# EAGLE board oresat-gps-card (EAGLE 9.6.1), part 1 of 3
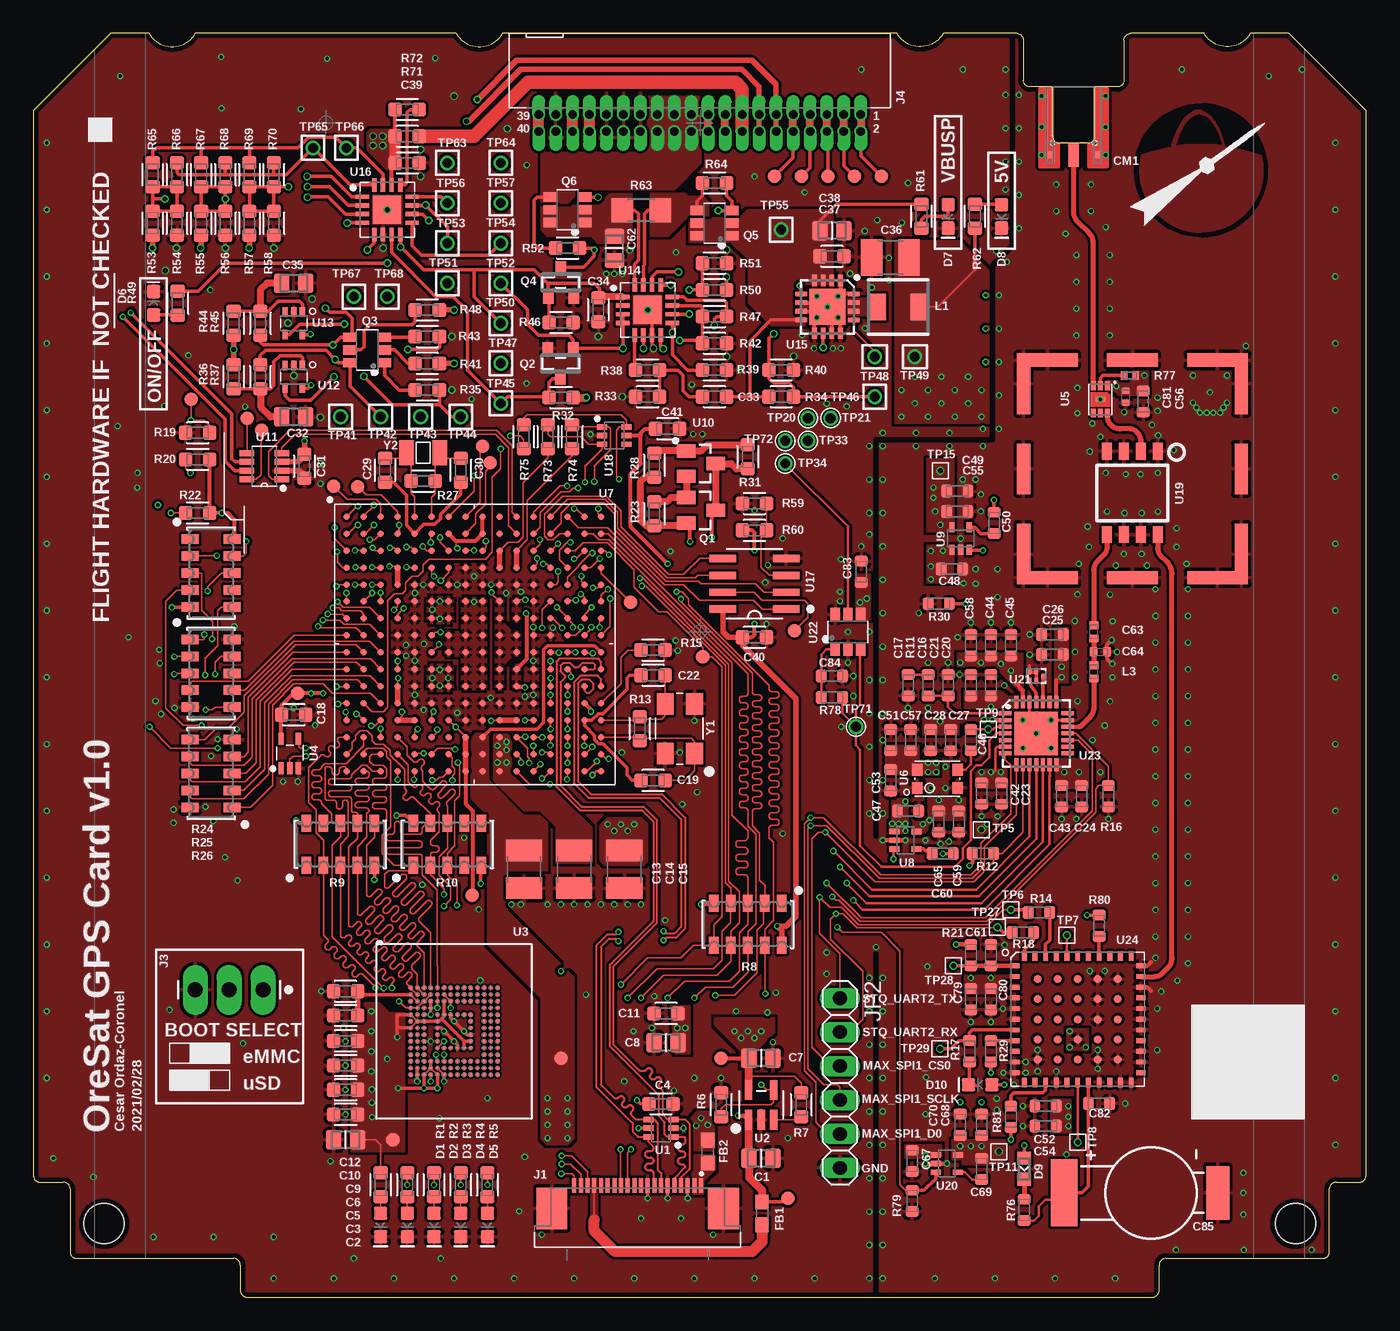
[diagram p0: board, top side]
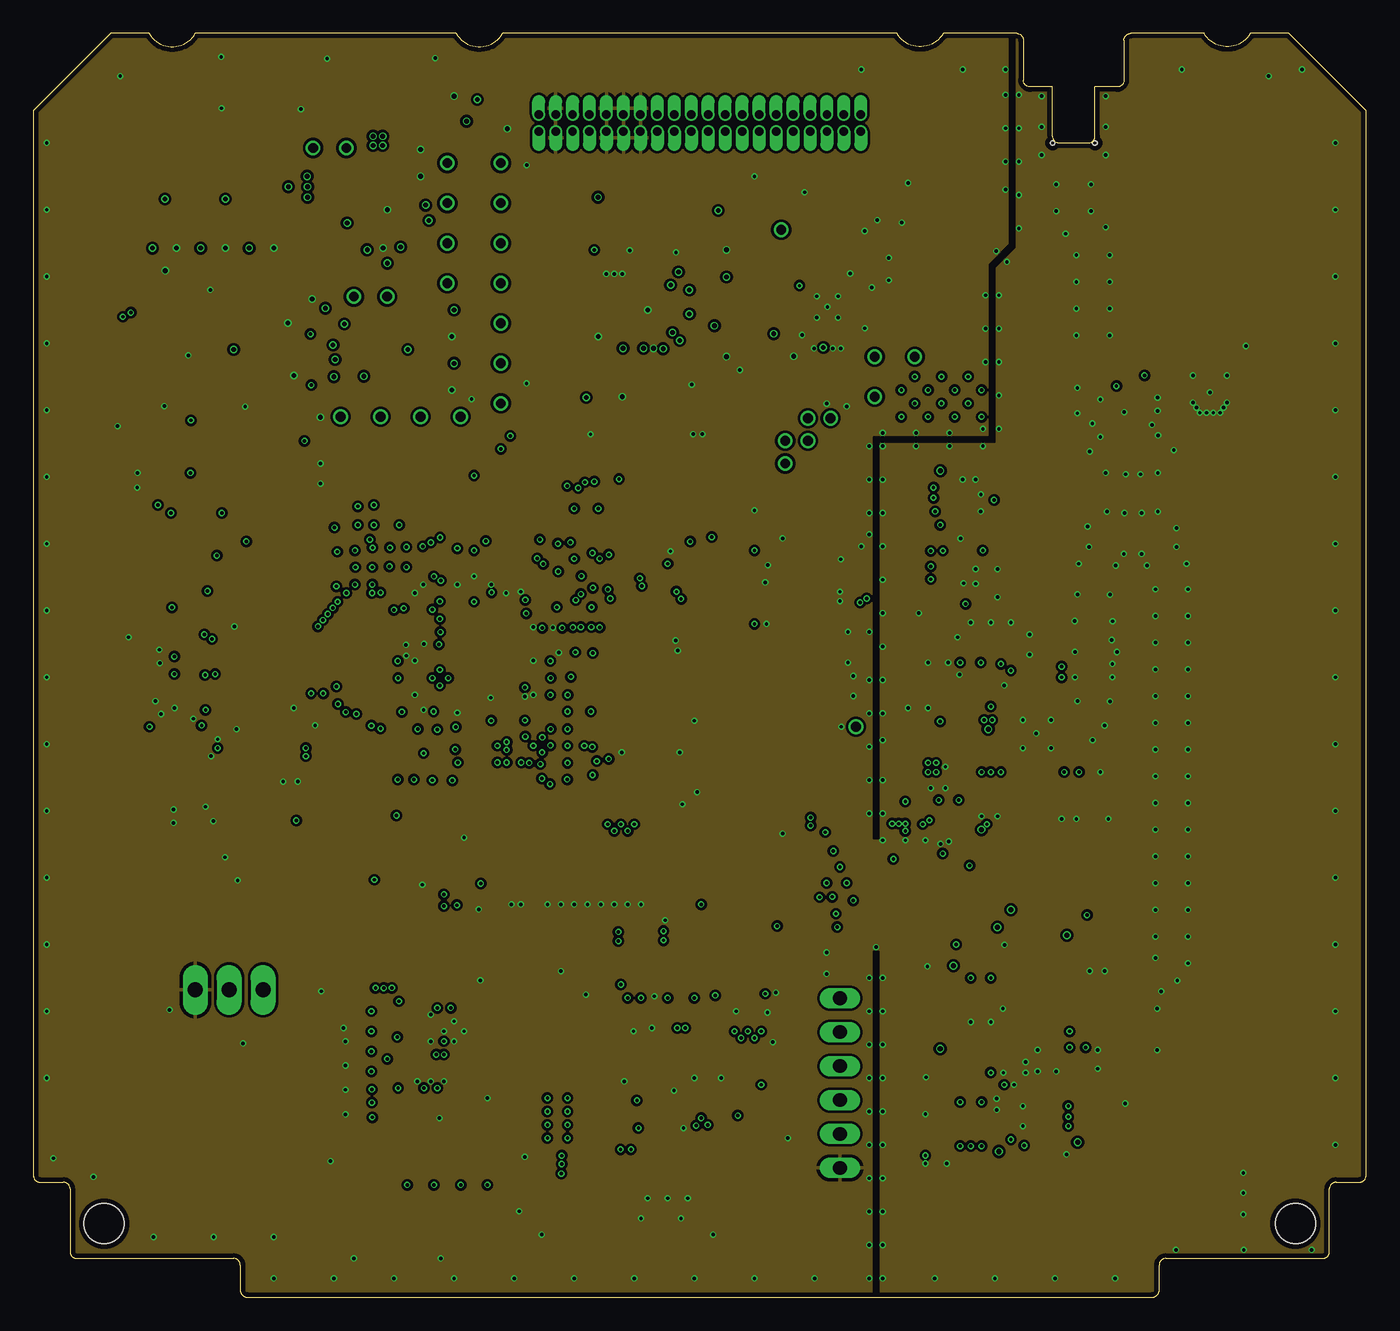
[diagram p1: board, inner layer Route2]
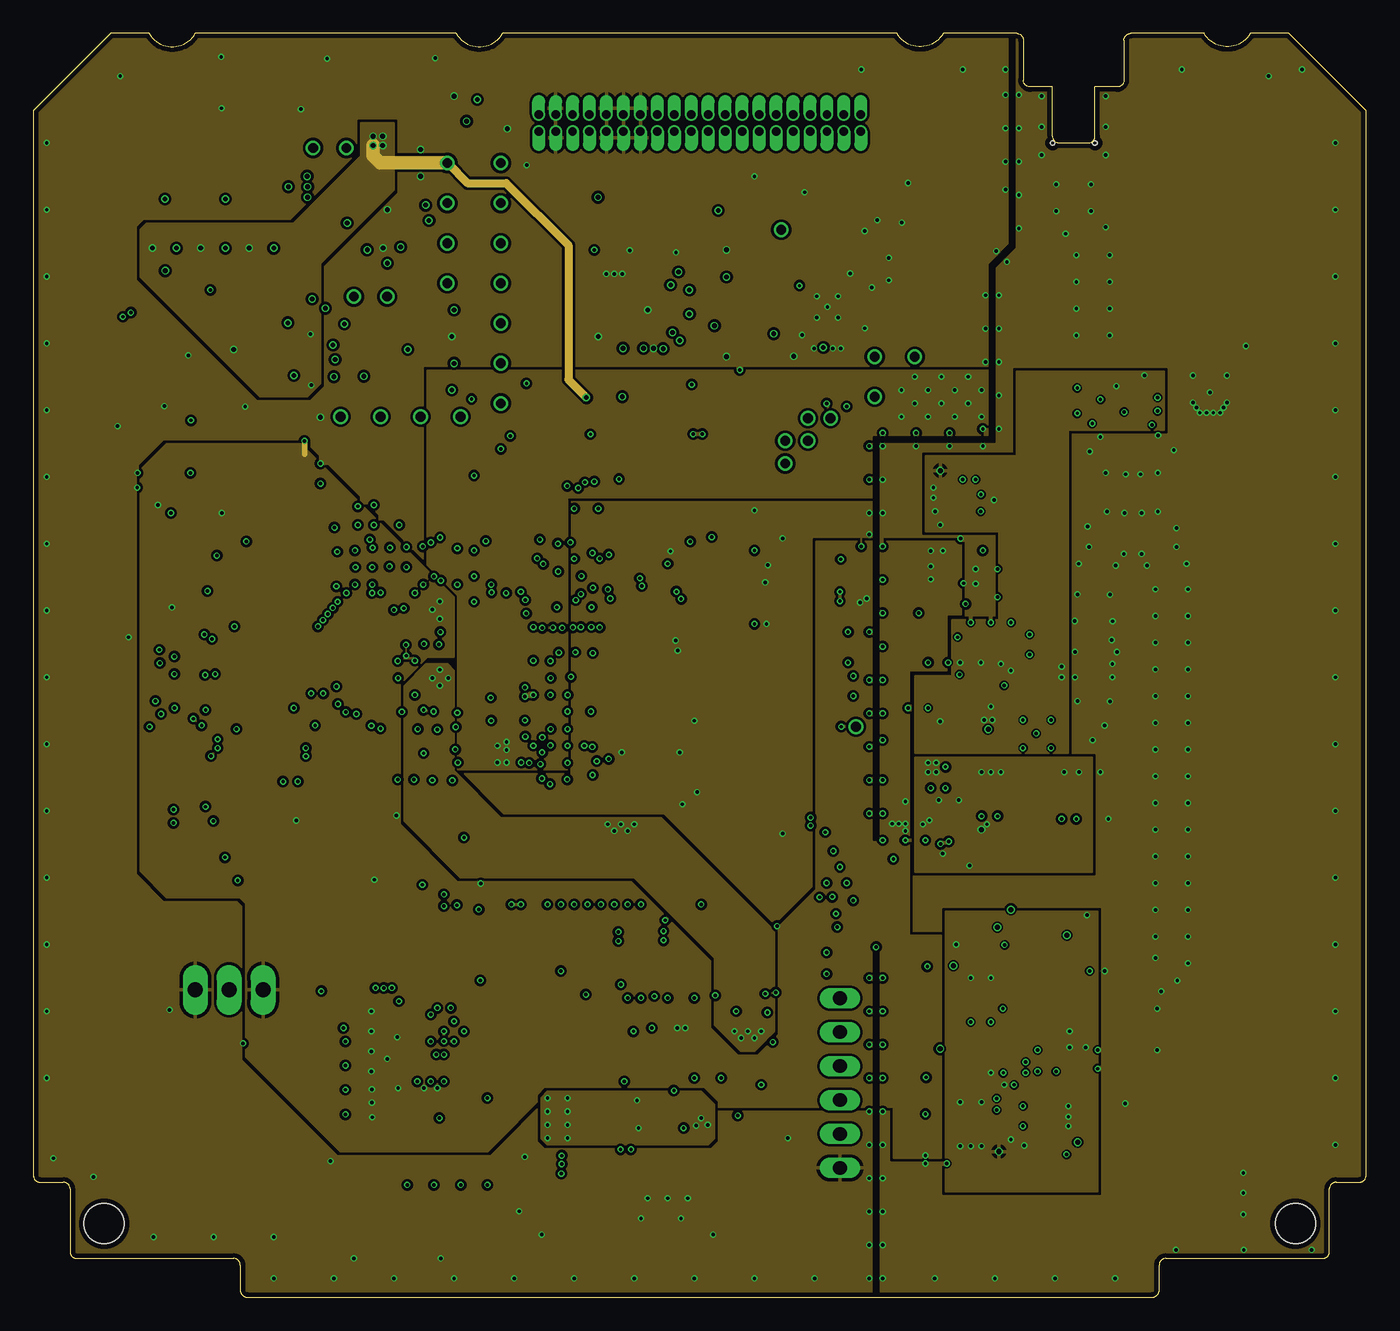
[diagram p2: board, inner layer Route15]
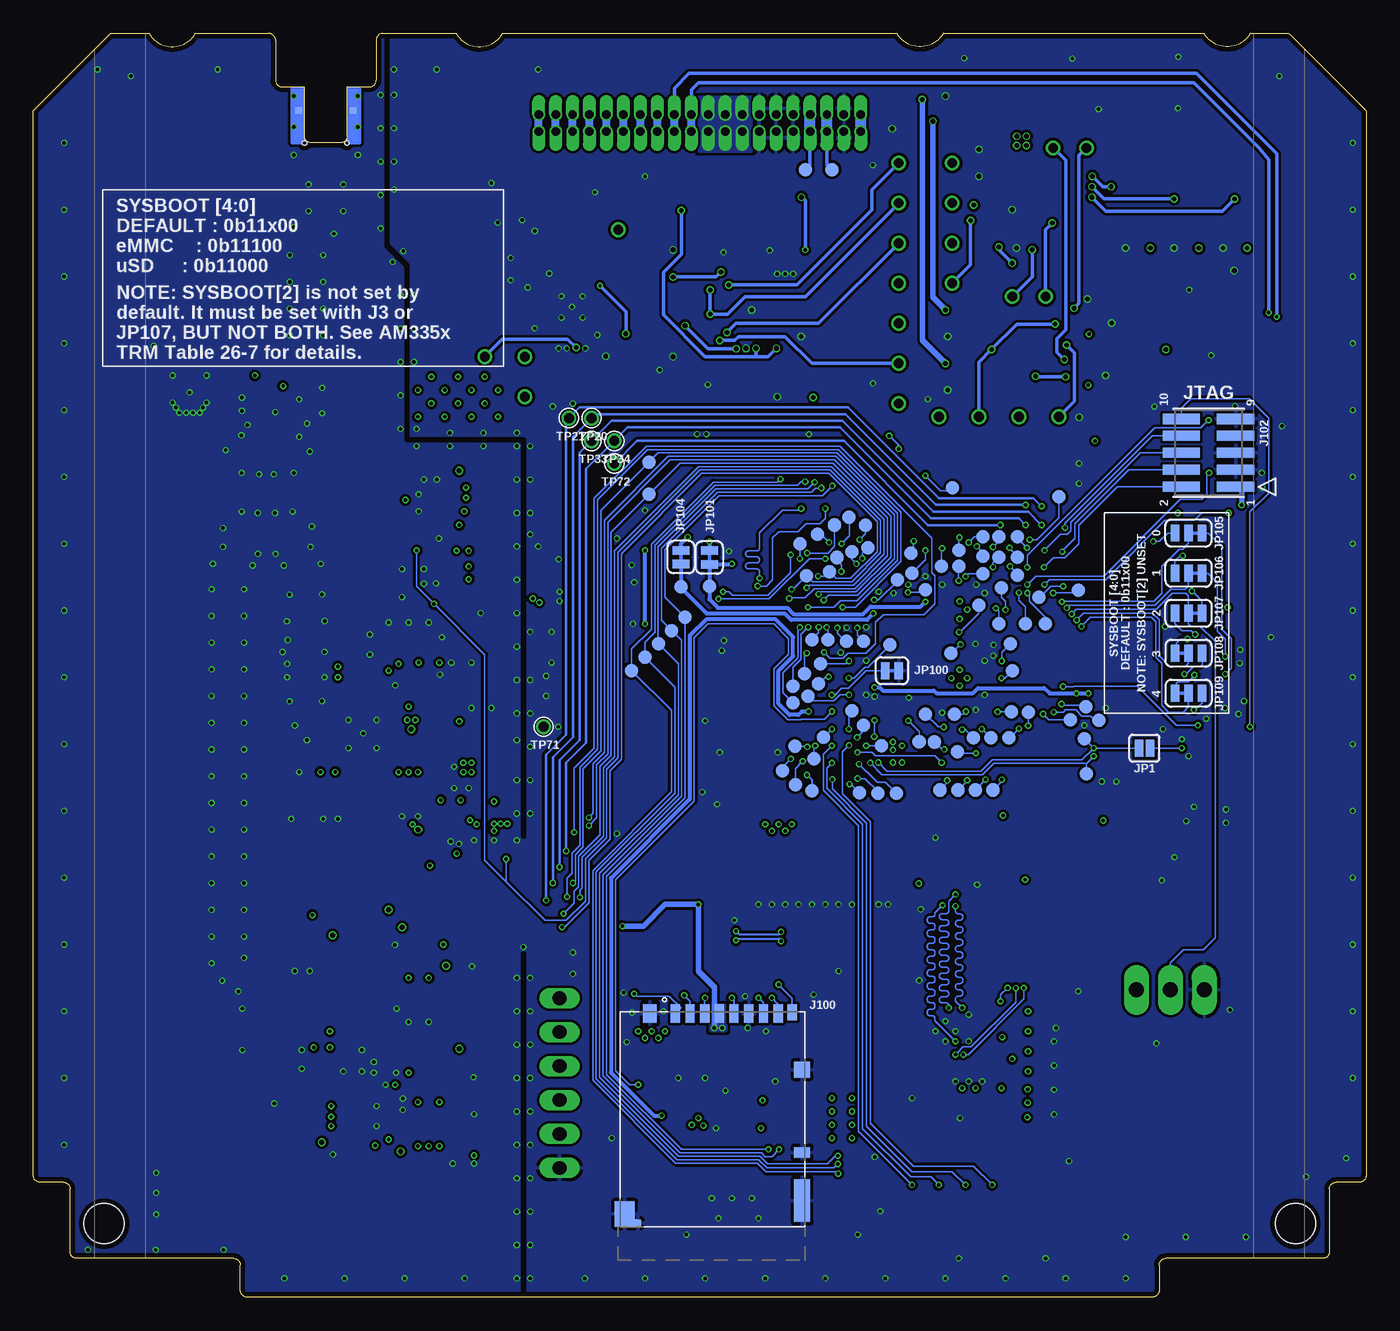
[diagram p3: board, bottom side, seen from below]

Size 99.8 x 94.6 mm. Coordinates in mm from the lower left corner, seen from the top.
Copper layers (1*2*15*16): Top 0.035559375mm / dielectric 0.17018125mm / Route2 0.01778125mm / dielectric 47mil / Route15 0.01778125mm / dielectric 0.17018125mm / Bottom 0.035559375mm
Design rules "4-layer_tented *": minimum track width 5mil, minimum drill 10mil, track to track 5mil, track to pad 5mil, pad to pad 5mil, via to via 5mil, smd to smd 5mil, copper to edge 15mil, drill to drill 6mil, minimum pad ring 4mil, minimum via ring 4mil, stop-mask expansion 2.5mil, vias tented up to drill 20mil, thermal gap 10mil
Net classes: 1 diff pair: width 0.191 mm, clearance 0.191 mm; 2 RF: clearance 0.75 mm
tRestrict: 6 lines
bRestrict: 6 lines

## Footprints (pad centres in the part's own frame; a part is rotated, then mirrored left to right if it is on the bottom)
.0805-B = smd 1.15 x 1.45: 1 -0.9,0; 2 0.9,0
.0603-A = smd 1 x 1.05: 1 -0.9,0; 2 0.9,0
C1210 = smd 1.6 x 2.7: 1 -1.4,0; 2 1.4,0
.0603-B-NOSILK = smd 0.8 x 0.95: 1 -0.8,0; 2 0.8,0
.0805-B-NOSILK = smd 1.15 x 1.45: 1 -0.9,0; 2 0.9,0
.0402-B-NOSILK = smd 0.6 x 0.7: 1 -0.5,0; 2 0.5,0
.0402-C-NOSILK = smd 0.5 x 0.6: 1 -0.45,0; 2 0.45,0
CAP-ELNA-DS-SERIES = smd 5 x 2: + 0,6.5 | smd 4 x 1.7: - 0,-5
J-MOLEX-SMPM-073300-003X = smd 0.508 x 0.508: P$1 -1.778,-5.08; P$2 1.778,-5.08 | smd 0.508 x 0.508 bottom: P$3 -2.032,-1.778; P$4 2.032,-1.778 | smd 0.762 x 1.778: RF 0,-5.08
LED-0603 = smd 1 x 1: A -0.877,0; C 0.877,0
0603-B-NOSILK-DIODE = smd 0.95 x 1: ANODE -0.8,0; CATHODE 0.8,0
0603 = smd 1.1 x 1: 1 -0.85,0; 2 0.85,0
TE_2-1734592-0 = smd 0.3 x 1.1: 1 -4.75,-1.7; 2 -4.25,-1.7; 3 -3.75,-1.7; 4 -3.25,-1.7; 5 -2.75,-1.7; 6 -2.25,-1.7; 7 -1.75,-1.7; 8 -1.25,-1.7; 9 -0.75,-1.7; 10 -0.25,-1.7; 11 0.25,-1.7; 12 0.75,-1.7; 13 1.25,-1.7; 14 1.75,-1.7; 15 2.25,-1.7; 16 2.75,-1.7; 17 3.25,-1.7; 18 3.75,-1.7; 19 4.25,-1.7; 20 4.75,-1.7 | smd 2.3 x 3.1: PAD1 6.42,0; PAD2 -6.42,0
1X03_LONGPADS = drill 1.118 pad 1.88 long: 1 0,0; 2 2.54,0; 3 5.08,0
J-SAMTEC-TFM-120-X1-XXX-D-RA = drill 0.635 pad 0.965 offset: 1 12.065,0.635; 2 12.065,-0.635; 3 10.795,0.635; 4 10.795,-0.635; 5 9.525,0.635; 6 9.525,-0.635; 7 8.255,0.635; 8 8.255,-0.635; 9 6.985,0.635; 10 6.985,-0.635; 11 5.715,0.635; 12 5.715,-0.635; 13 4.445,0.635; 14 4.445,-0.635; 15 3.175,0.635; 16 3.175,-0.635; 17 1.905,0.635; 18 1.905,-0.635; 19 0.635,0.635; 20 0.635,-0.635; 21 -0.635,0.635; 22 -0.635,-0.635; 23 -1.905,0.635; 24 -1.905,-0.635; 25 -3.175,0.635; 26 -3.175,-0.635; 27 -4.445,0.635; 28 -4.445,-0.635; 29 -5.715,0.635; 30 -5.715,-0.635; 31 -6.985,0.635; 32 -6.985,-0.635; 33 -8.255,0.635; 34 -8.255,-0.635; 35 -9.525,0.635; 36 -9.525,-0.635; 37 -10.795,0.635; 38 -10.795,-0.635; 39 -12.065,0.635; 40 -12.065,-0.635
DM3BT-DSF-PEJS = smd 0.7 x 1.4: 1 -3.2,15.95; 2 -2.1,15.95; 3 -1,15.95; 4 0.1,15.95; 5 1.2,15.95; 6 2.3,15.95; 7 3.4,15.95; 8 4.5,15.95 | smd 0.7 x 1.2: CD 5.55,16.05 | smd 0.5 x 0.5: CGND1 -6,0.25 | smd 1.5 x 1.9: CGND2 -7,0.95 | smd 0.21 x 0.21 rotated 45: CGND3 -6.25,0.5 | smd 1 x 1.4: CGND4 -5.1,15.95 | smd 1.2 x 1.2: CGND5 6.3,11.75 | smd 1.2 x 3.2: CGND6 6.3,1.95 | smd 1.2 x 0.8: GND 6.3,5.55
CON10_2X5_DUK_FTSH = smd 0.762 x 2.794: 1 -2.54,-2.032; 2 -2.54,2.032; 3 -1.27,-2.032; 4 -1.27,2.032; 5 0,-2.032; 6 0,2.032; 7 1.27,-2.032; 8 1.27,2.032; 9 2.54,-2.032; 10 2.54,2.032
SMT-JUMPER_2_NO_SILK = smd 0.635 x 1.27: 1 -0.406,0; 2 0.406,0
1X06 = drill 1.016 long: 1 -6.35,0; 2 -3.81,0; 3 -1.27,0; 4 1.27,0; 5 3.81,0; 6 6.35,0
SMT-JUMPER_2_NC_TRACE_SILK = smd 0.635 x 1.27: 1 -0.508,0; 2 0.508,0
SMT-JUMPER_3_1-NC_TRACE_SILK = smd 0.635 x 1.27: 1 -1.016,0; 2 0,0; 3 1.016,0
ECS-MPI4040 = smd 2 x 1.3: 1 0,1.575; 2 0,-1.575
ORESAT-CARD-V1.3-GENERIC-1RF-POS2 = hole 0.32: 76.31,86.4; 79.49,86.4 | hole 3: 94.5,5.5; 5.3,5.5
SOT23-BEC = smd 1 x 1.4: B -0.95,-1.1; C 0,1.1; E 0.95,-1.1
SOT23 = smd 0.787 x 0.889: 1 -0.953,-1.143; 2 0.953,-1.143; 3 0,1.143
SOT23-6 = smd 0.7 x 1: 1 -0.95,-1.3; 2 0,-1.3; 3 0.95,-1.3; 4 0.95,1.3; 5 0,1.3; 6 -0.95,1.3
ARRAY_EXBA-M = smd 1.27 x 0.711: 1 -1.575,2.54; 2 -1.575,1.27; 3 -1.575,0; 4 -1.575,-1.27; 5 -1.575,-2.54; 6 1.575,-2.54; 7 1.575,-1.27; 8 1.575,0; 9 1.575,1.27; 10 1.575,2.54
R1206 = smd 1.6 x 1.803: 1 -1.422,0; 2 1.422,0
0402-C-NOSILK@1 = smd 0.49 x 0.62: 1 -0.43,0; 2 0.43,0
BMI-S-202 = smd 1 x 4.55: P$1 -8.15,-6.375; P$7 -8.15,6.375; P$11 8.15,6.375; P$12 8.15,-6.375 | smd 4.55 x 1: P$2 -6.375,-8.15; P$8 6.375,-8.15; P$9 -6.375,8.15; P$10 6.375,8.15 | smd 1 x 3.8: P$3 -8.15,0; P$6 8.15,0 | smd 3.8 x 1: P$4 0,-8.15; P$5 0,8.15
PAD.03X.04 = smd 1.016 x 1.016: P$1 0,0
15MIL-TEST-POINT = drill 0.381: P$1 0,0
1X01 = drill 0.737 pad 1.1: 1 0,0
2MM-TEST-POINT = drill 0.737: 1 0,0
SC70-6 = smd 0.4 x 0.75: 1 -0.65,-0.925; 2 0,-0.925; 3 0.65,-0.925; 4 0.65,0.925; 5 0,0.925; 6 -0.65,0.925
DBV5 = smd 1.473 x 0.559: 1 -1.118,0.95; 2 -1.118,0; 3 -1.118,-0.95; 4 1.118,-0.95; 5 1.118,0.95
BGA-153(11.5X13)(EMMC-BA) = smd 0.28 x 0.28: A1 -3.25,3.25; A2 -2.75,3.25; A3 -2.25,3.25; A4 -1.75,3.25; A5 -1.25,3.25; A6 -0.75,3.25; A7 -0.25,3.25; A8 0.25,3.25; A9 0.75,3.25; A10 1.25,3.25; A11 1.75,3.25; A12 2.25,3.25; A13 2.75,3.25; A14 3.25,3.25; B1 -3.25,2.75; B2 -2.75,2.75; B3 -2.25,2.75; B4 -1.75,2.75; B5 -1.25,2.75; B6 -0.75,2.75; B7 -0.25,2.75; B8 0.25,2.75; B9 0.75,2.75; B10 1.25,2.75; B11 1.75,2.75; B12 2.25,2.75; B13 2.75,2.75; B14 3.25,2.75; C1 -3.25,2.25; C2 -2.75,2.25; C3 -2.25,2.25; C4 -1.75,2.25; C5 -1.25,2.25; C6 -0.75,2.25; C7 -0.25,2.25; C8 0.25,2.25; C9 0.75,2.25; C10 1.25,2.25; C11 1.75,2.25; C12 2.25,2.25; C13 2.75,2.25; C14 3.25,2.25; D1 -3.25,1.75; D2 -2.75,1.75; D3 -2.25,1.75; D4 -1.75,1.75; D12 2.25,1.75; D13 2.75,1.75; D14 3.25,1.75; E1 -3.25,1.25; E2 -2.75,1.25; E3 -2.25,1.25; E5 -1.25,1.25; E6 -0.75,1.25; E7 -0.25,1.25; E8 0.25,1.25; E9 0.75,1.25; E10 1.25,1.25; E12 2.25,1.25; E13 2.75,1.25; E14 3.25,1.25; F1 -3.25,0.75; F2 -2.75,0.75; F3 -2.25,0.75; F5 -1.25,0.75; F10 1.25,0.75; F12 2.25,0.75; F13 2.75,0.75; F14 3.25,0.75; G1 -3.25,0.25; G2 -2.75,0.25; G3 -2.25,0.25; G5 -1.25,0.25; G10 1.25,0.25; G12 2.25,0.25; G13 2.75,0.25; G14 3.25,0.25; H1 -3.25,-0.25; H2 -2.75,-0.25; H3 -2.25,-0.25; H5 -1.25,-0.25; H10 1.25,-0.25; H12 2.25,-0.25; H13 2.75,-0.25; H14 3.25,-0.25; J1 -3.25,-0.75; J2 -2.75,-0.75; J3 -2.25,-0.75; J5 -1.25,-0.75; J10 1.25,-0.75; J12 2.25,-0.75; J13 2.75,-0.75; J14 3.25,-0.75; K1 -3.25,-1.25; K2 -2.75,-1.25; K3 -2.25,-1.25; K5 -1.25,-1.25; K6 -0.75,-1.25; K7 -0.25,-1.25; K8 0.25,-1.25; K9 0.75,-1.25; K10 1.25,-1.25; K12 2.25,-1.25; K13 2.75,-1.25; K14 3.25,-1.25; L1 -3.25,-1.75; L2 -2.75,-1.75; L3 -2.25,-1.75; L12 2.25,-1.75; L13 2.75,-1.75; L14 3.25,-1.75; M1 -3.25,-2.25; M2 -2.75,-2.25; M3 -2.25,-2.25; M4 -1.75,-2.25; M5 -1.25,-2.25; M6 -0.75,-2.25; M7 -0.25,-2.25; M8 0.25,-2.25; M9 0.75,-2.25; M10 1.25,-2.25; M11 1.75,-2.25; M12 2.25,-2.25; M13 2.75,-2.25; M14 3.25,-2.25; N1 -3.25,-2.75; N2 -2.75,-2.75; N3 -2.25,-2.75; N4 -1.75,-2.75; N5 -1.25,-2.75; N6 -0.75,-2.75; N7 -0.25,-2.75; N8 0.25,-2.75; N9 0.75,-2.75; N10 1.25,-2.75; N11 1.75,-2.75; N12 2.25,-2.75; N13 2.75,-2.75; N14 3.25,-2.75; P1 -3.25,-3.25; P2 -2.75,-3.25; P3 -2.25,-3.25; P4 -1.75,-3.25; P5 -1.25,-3.25; P6 -0.75,-3.25; P7 -0.25,-3.25; P8 0.25,-3.25; P9 0.75,-3.25; P10 1.25,-3.25; P11 1.75,-3.25; P12 2.25,-3.25; P13 2.75,-3.25; P14 3.25,-3.25
C70(TI-DCK) = smd 0.4 x 0.9: 1 0.65,1.1; 2 0,1.1; 3 -0.65,1.1; 4 -0.65,-1.1; 5 0.65,-1.1
SKY65723-81 = smd 0.375 x 0.66: 1 0.54,1.02; 2 0,1.02; 3 -0.54,1.02; 4 -0.54,-1.02; 5 0,-1.02; 6 0.54,-1.02 | smd 0.66 x 0.375: GND 0,0
TCX_7Q = smd 0.78 x 0.87: 1 -1.51,-0.68; 2 1.51,-0.68; 3 1.51,0.68; 4 -1.51,0.68
OSD335X-BGA-256 = smd 0.5 x 0.5: A1 -9.525,-9.525; A2 -9.525,-8.255; A3 -9.525,-6.985; A4 -9.525,-5.715; A5 -9.525,-4.445; A6 -9.525,-3.175; A7 -9.525,-1.905; A8 -9.525,-0.635; A9 -9.525,0.635; A10 -9.525,1.905; A11 -9.525,3.175; A12 -9.525,4.445; A13 -9.525,5.715; A14 -9.525,6.985; A15 -9.525,8.255; A16 -9.525,9.525; B1 -8.255,-9.525; B2 -8.255,-8.255; B3 -8.255,-6.985; B4 -8.255,-5.715; B5 -8.255,-4.445; B6 -8.255,-3.175; B7 -8.255,-1.905; B8 -8.255,-0.635; B9 -8.255,0.635; B10 -8.255,1.905; B11 -8.255,3.175; B12 -8.255,4.445; B13 -8.255,5.715; B14 -8.255,6.985; B15 -8.255,8.255; B16 -8.255,9.525; C1 -6.985,-9.525; C2 -6.985,-8.255; C3 -6.985,-6.985; C4 -6.985,-5.715; C5 -6.985,-4.445; C6 -6.985,-3.175; C7 -6.985,-1.905; C8 -6.985,-0.635; C9 -6.985,0.635; C10 -6.985,1.905; C11 -6.985,3.175; C12 -6.985,4.445; C13 -6.985,5.715; C14 -6.985,6.985; C15 -6.985,8.255; C16 -6.985,9.525; D1 -5.715,-9.525; D2 -5.715,-8.255; D3 -5.715,-6.985; D4 -5.715,-5.715; D5 -5.715,-4.445; D6 -5.715,-3.175; D7 -5.715,-1.905; D8 -5.715,-0.635; D9 -5.715,0.635; D10 -5.715,1.905; D11 -5.715,3.175; D12 -5.715,4.445; D13 -5.715,5.715; D14 -5.715,6.985; D15 -5.715,8.255; D16 -5.715,9.525; E1 -4.445,-9.525; E2 -4.445,-8.255; E3 -4.445,-6.985; E4 -4.445,-5.715; E5 -4.445,-4.445; E6 -4.445,-3.175; E7 -4.445,-1.905; E8 -4.445,-0.635; E9 -4.445,0.635; E10 -4.445,1.905; E11 -4.445,3.175; E12 -4.445,4.445; E13 -4.445,5.715; E14 -4.445,6.985; E15 -4.445,8.255; E16 -4.445,9.525; F1 -3.175,-9.525; F2 -3.175,-8.255; F3 -3.175,-6.985; F4 -3.175,-5.715; F5 -3.175,-4.445; F6 -3.175,-3.175; F7 -3.175,-1.905; F8 -3.175,-0.635; F9 -3.175,0.635; F10 -3.175,1.905; F11 -3.175,3.175; F12 -3.175,4.445; F13 -3.175,5.715; F14 -3.175,6.985; F15 -3.175,8.255; F16 -3.175,9.525; G1 -1.905,-9.525; G2 -1.905,-8.255; G3 -1.905,-6.985; G4 -1.905,-5.715; G5 -1.905,-4.445; G6 -1.905,-3.175; G7 -1.905,-1.905; G8 -1.905,-0.635; G9 -1.905,0.635; G10 -1.905,1.905; G11 -1.905,3.175; G12 -1.905,4.445; G13 -1.905,5.715; G14 -1.905,6.985; G15 -1.905,8.255; G16 -1.905,9.525; H1 -0.635,-9.525; H2 -0.635,-8.255; H3 -0.635,-6.985; H4 -0.635,-5.715; H5 -0.635,-4.445; H6 -0.635,-3.175; H7 -0.635,-1.905; H8 -0.635,-0.635; H9 -0.635,0.635; H10 -0.635,1.905; H11 -0.635,3.175; H12 -0.635,4.445; H13 -0.635,5.715; H14 -0.635,6.985; H15 -0.635,8.255; H16 -0.635,9.525; J1 0.635,-9.525; J2 0.635,-8.255; J3 0.635,-6.985; J4 0.635,-5.715; J5 0.635,-4.445; J6 0.635,-3.175; J7 0.635,-1.905; J8 0.635,-0.635; J9 0.635,0.635; J10 0.635,1.905; J11 0.635,3.175; J12 0.635,4.445; J13 0.635,5.715; J14 0.635,6.985; J15 0.635,8.255; J16 0.635,9.525; K1 1.905,-9.525; K2 1.905,-8.255; K3 1.905,-6.985; K4 1.905,-5.715; K5 1.905,-4.445; K6 1.905,-3.175; K7 1.905,-1.905; K8 1.905,-0.635; K9 1.905,0.635; K10 1.905,1.905; K11 1.905,3.175; K12 1.905,4.445; K13 1.905,5.715; K14 1.905,6.985; K15 1.905,8.255; K16 1.905,9.525; L1 3.175,-9.525; L2 3.175,-8.255; L3 3.175,-6.985; L4 3.175,-5.715; L5 3.175,-4.445; L6 3.175,-3.175; L7 3.175,-1.905; L8 3.175,-0.635; L9 3.175,0.635; L10 3.175,1.905; L11 3.175,3.175; L12 3.175,4.445; L13 3.175,5.715; L14 3.175,6.985; L15 3.175,8.255; L16 3.175,9.525; M1 4.445,-9.525; M2 4.445,-8.255; M3 4.445,-6.985; M4 4.445,-5.715; M5 4.445,-4.445; M6 4.445,-3.175; M7 4.445,-1.905; M8 4.445,-0.635; M9 4.445,0.635; M10 4.445,1.905; M11 4.445,3.175; M12 4.445,4.445; M13 4.445,5.715; M14 4.445,6.985; M15 4.445,8.255; M16 4.445,9.525; N1 5.715,-9.525; N2 5.715,-8.255; N3 5.715,-6.985; N4 5.715,-5.715; N5 5.715,-4.445; N6 5.715,-3.175; N7 5.715,-1.905; N8 5.715,-0.635; N9 5.715,0.635; N10 5.715,1.905; N11 5.715,3.175; N12 5.715,4.445; N13 5.715,5.715; N14 5.715,6.985; N15 5.715,8.255; N16 5.715,9.525; P1 6.985,-9.525; P2 6.985,-8.255; P3 6.985,-6.985; P4 6.985,-5.715; P5 6.985,-4.445; P6 6.985,-3.175; P7 6.985,-1.905; P8 6.985,-0.635; P9 6.985,0.635; P10 6.985,1.905; P11 6.985,3.175; P12 6.985,4.445; P13 6.985,5.715; P14 6.985,6.985; P15 6.985,8.255; P16 6.985,9.525; R1 8.255,-9.525; R2 8.255,-8.255; R3 8.255,-6.985; R4 8.255,-5.715; R5 8.255,-4.445; R6 8.255,-3.175; R7 8.255,-1.905; R8 8.255,-0.635; R9 8.255,0.635; R10 8.255,1.905; R11 8.255,3.175; R12 8.255,4.445; R13 8.255,5.715; R14 8.255,6.985; R15 8.255,8.255; R16 8.255,9.525; T1 9.525,-9.525; T2 9.525,-8.255; T3 9.525,-6.985; T4 9.525,-5.715; T5 9.525,-4.445; T6 9.525,-3.175; T7 9.525,-1.905; T8 9.525,-0.635; T9 9.525,0.635; T10 9.525,1.905; T11 9.525,3.175; T12 9.525,4.445; T13 9.525,5.715; T14 9.525,6.985; T15 9.525,8.255; T16 9.525,9.525
SC70 = smd 0.4 x 0.75: 1 -0.65,-0.825; 2 0,-0.825; 3 0.65,-0.825; 4 0.65,0.825; 5 -0.65,0.825
SOT23-3 = smd 1 x 1.4: 1 -0.95,-1.1; 2 0.95,-1.1; 3 0,1.1
SOT23-8_TI-DCN = smd 0.45 x 1.1: 1 -0.975,-1.3; 2 -0.325,-1.3; 3 0.325,-1.3; 4 0.975,-1.3; 5 0.975,1.3; 6 0.325,1.3; 7 -0.325,1.3; 8 -0.975,1.3
SC70-5 = smd 0.4 x 0.7: 1 -0.65,-0.85; 2 0,-0.85; 3 0.65,-0.85; 4 0.65,0.85; 5 -0.65,0.85
QFN65P400X400X80-17T210 = smd 1.01 x 0.32: 1 -1.86,0.975; 2 -1.86,0.325; 3 -1.86,-0.325; 4 -1.86,-0.975; 9 1.86,-0.975; 10 1.86,-0.325; 11 1.86,0.325; 12 1.86,0.975 | smd 0.32 x 1.01: 5 -0.975,-1.86; 6 -0.325,-1.86; 7 0.325,-1.86; 8 0.975,-1.86; 13 0.975,1.86; 14 0.325,1.86; 15 -0.325,1.86; 16 -0.975,1.86 | smd 2.1 x 2.1: EPAD 0,0
S-PVQFN-16 = smd 0.85 x 0.35: 1 -1.975,0.975; 2 -1.975,0.325; 3 -1.975,-0.325; 4 -1.975,-0.975; 9 1.975,-0.975; 10 1.975,-0.325; 11 1.975,0.325; 12 1.975,0.975 | smd 0.35 x 0.85: 5 -0.975,-1.975; 6 -0.325,-1.975; 7 0.325,-1.975; 8 0.975,-1.975; 13 0.975,1.975; 14 0.325,1.975; 15 -0.325,1.975; 16 -0.975,1.975 | smd 2.7 x 2.7: PAD 0,0
SOIC8 = smd 1.981 x 0.559: 1 -2.362,1.905; 2 -2.362,0.635; 3 -2.362,-0.635; 4 -2.362,-1.905; 5 2.362,-1.905; 6 2.362,-0.635; 7 2.362,0.635; 8 2.362,1.905
MINICIRCUITS = smd 0.762 x 1.27: 1 -1.905,-3.111; 2 -0.635,-3.111; 3 0.635,-3.111; 4 1.905,-3.111; 5 1.905,3.111; 6 0.635,3.111; 7 -0.635,3.111; 8 -1.905,3.111
SAW_1.4X1.1 = smd 0.25 x 0.325: 1 -0.5,0; 2 0,-0.287; 3 0.5,-0.287; 4 0.5,0.287; 5 0,0.287
SOT23-6' = smd 0.7 x 1: 1 0.95,1.3; 2 0,1.3; 3 -0.95,1.3; 4 -0.95,-1.3; 5 0,-1.3; 6 0.95,-1.3
90-0023 = smd 0.95 x 0.3: 1 -2.34,1.5; 2 -2.34,1; 3 -2.34,0.5; 4 -2.34,0; 5 -2.34,-0.5; 6 -2.34,-1; 7 -2.34,-1.5; 15 2.34,-1.5; 16 2.34,-1; 17 2.34,-0.5; 18 2.34,0; 19 2.34,0.5; 20 2.34,1; 21 2.34,1.5 | smd 0.3 x 0.95: 8 -1.5,-2.34; 9 -1,-2.34; 10 -0.5,-2.34; 11 0,-2.34; 12 0.5,-2.34; 13 1,-2.34; 14 1.5,-2.34; 22 1.5,2.34; 23 1,2.34; 24 0.5,2.34; 25 0,2.34; 26 -0.5,2.34; 27 -1,2.34; 28 -1.5,2.34 | smd 3.25 x 3.25: BODY 0,0
VENUS838LPX = smd 0.7 x 0.36: 1 -4.73,4; 2 -4.73,3.2; 3 -4.73,2.4; 4 -4.73,1.6; 5 -4.73,0.8; 6 -4.73,0; 7 -4.73,-0.8; 8 -4.73,-1.6; 9 -4.73,-2.4; 10 -4.73,-3.2; 11 -4.73,-4; 23 4.73,-4; 24 4.73,-3.2; 25 4.73,-2.4; 26 4.73,-1.6; 27 4.73,-0.8; 28 4.73,0; 29 4.73,0.8; 30 4.73,1.6; 31 4.73,2.4; 32 4.73,3.2; 33 4.73,4 | smd 0.36 x 0.7: 12 -4,-4.73; 13 -3.2,-4.73; 14 -2.4,-4.73; 15 -1.6,-4.73; 16 -0.8,-4.73; 17 0,-4.73; 18 0.8,-4.73; 19 1.6,-4.73; 20 2.4,-4.73; 21 3.2,-4.73; 22 4,-4.73; 34 4,4.73; 35 3.2,4.73; 36 2.4,4.73; 37 1.6,4.73; 38 0.8,4.73; 39 0,4.73; 40 -0.8,4.73; 41 -1.6,4.73; 42 -2.4,4.73; 43 -3.2,4.73; 44 -4,4.73 | smd 0.6 x 0.6: 45 -3,3; 46 -3,1.5; 47 -3,0; 48 -3,-1.5; 49 -3,-3; 50 -1.5,3; 51 -1.5,1.5; 52 -1.5,0; 53 -1.5,-1.5; 54 -1.5,-3; 55 0,3; 56 0,1.5; 57 0,0; 58 0,-1.5; 59 0,-3; 60 1.5,3; 61 1.5,1.5; 62 1.5,0; 63 1.5,-1.5; 64 1.5,-3; 65 3,3; 66 3,1.5; 67 3,0; 68 3,-1.5; 69 3,-3
5X3.2-4SMD = smd 1.6 x 1.25: 1 -1.85,-1.1; 2 1.85,-1.1; 3 1.85,1.1; 4 -1.85,1.1
CRYSTAL_3.2X1.5 = smd 1.1 x 1.9: P$1 -1.25,0; P$2 1.25,0

## Placement (x,y rotation side)
C1  10uF  [.0805-B]  54.5,10.4 0 top
C2  10uF  [.0805-B]  23.38,11.78 180 top
C3  1uF  [.0603-A]  23.38,13.68 180 top
C4  0.1uF  [.0603-A]  47,14.46 0 top
C5  1uF  [.0603-A]  23.38,15.53 180 top
C6  1uF  [.0603-A]  23.38,17.34 180 top
C7  10uF  [.0805-B]  54.5,17.9 0 top
C8  10uF  [.0805-B]  47.38,19.06 180 top
C9  1uF  [.0603-A]  23.38,19.18 180 top
C10  1uF  [.0603-A]  23.38,21.09 180 top
C11  0.1uF  [.0603-A]  47.38,21.24 180 top
C12  1uF  [.0603-A]  23.38,22.9 180 top
C13  22uF  [C1210]  36.75,32.02 270 top
C14  22uF  [C1210]  40.5,32.02 270 top
C15  22uF  [C1210]  44.25,32.02 270 top
C16  27p  [.0603-B-NOSILK]  68.5,45.8 90 top
C17  470p  [.0603-B-NOSILK]  65.5,45.8 270 top
C18  0.1uF  [.0603-A]  19.5,43.6 0 top
C19  12pF, 50V  [.0603-A]  46.41,38.68 0 top
C20  100n  [.0603-B-NOSILK]  71.7,45.8 90 top
C21  100p  [.0603-B-NOSILK]  70.2,45.8 90 top
C22  12pF, 50V  [.0603-A]  46.41,46.56 0 top
C23  100n  [.0603-B-NOSILK]  72.5,37.7 270 top
C24  100n  [.0603-B-NOSILK]  78.5,37.5 270 top
C25  100n  [.0603-B-NOSILK]  76.3,48.1 180 top
C26  100p  [.0603-B-NOSILK]  76.3,49.6 180 top
C27  100p  [.0603-B-NOSILK]  68.7,41.7 270 top
C28  100n  [.0603-B-NOSILK]  67.2,41.7 270 top
C29  12pF, 50V  [.0603-A]  26.34,61.9 270 top
C30  12pF, 50V  [.0603-A]  32,61.9 270 top
C31  0.1uF  [.0603-A]  20.3,62.2 90 top
C32  1uF  [.0805-B-NOSILK]  19.5,65.9 0 top
C33  NP  [.0603-A]  51,67.4 0 top
C34  1uF  [.0603-A]  42.31,73.9 270 top
C35  1uF  [.0805-B-NOSILK]  19.5,75.9 0 top
C36  22uF  [C1210]  64.16,77.83 180 top
C37  1uF  [.0603-A]  59.8,77.91 0 top
C38  10uF  [.0805-B]  59.79,79.84 0 top
C39  0.1uF  [.0603-A]  28,84.9 180 top
C40  0.1uF  [.0603-A]  54,49.4 180 top
C41  0.1uF  [.0603-A]  47.5,65 0 top
C42  100p  [.0603-B-NOSILK]  71,37.7 270 top
C43  100p  [.0603-B-NOSILK]  77,37.5 270 top
C44  100p  [.0603-B-NOSILK]  71.7,48.8 90 top
C45  100n  [.0603-B-NOSILK]  73.2,48.8 90 top
C46  10n  [.0603-B-NOSILK]  70.2,41.7 90 top
C47  1u  [.0603-B-NOSILK]  65.5,36.4 0 top
C48  1u  [.0603-B-NOSILK]  68.78,54.5 0 top
C49  1u  [.0603-B-NOSILK]  69.18,60.34 0 top
C50  10n  [.0603-B-NOSILK]  71.94,57.96 270 top
C51  100n  [.0603-B-NOSILK]  64.2,41.7 90 top
C52  1u  [.0603-B-NOSILK]  75.8,14.3 180 top
C53  2.2u  [.0603-B-NOSILK]  64.2,38.7 270 top
C54  100p  [.0603-B-NOSILK]  75.8,12.8 180 top
C55  100n  [.0603-B-NOSILK]  69.18,58.82 0 top
C56  100n  [.0603-B-NOSILK]  83.1,67.04 270 top
C57  100p  [.0603-B-NOSILK]  65.7,41.7 90 top
C58  2.2u  [.0603-B-NOSILK]  70.2,48.8 90 top
C59  1u  [.0603-B-NOSILK]  69.3,35.6 270 top
C60  10n  [.0603-B-NOSILK]  68.1,33.2 180 top
C61  100n  [.0603-B-NOSILK]  71.7,25.6 270 top
C62  10uF  [.0805-B]  43.5,78.5 270 top
C63  470p  [.0402-B-NOSILK]  79.4,49.8 270 top
C64  1.7p  [.0402-B-NOSILK]  79.9,48.3 180 top
C65  100n  [.0603-B-NOSILK]  67.8,35.6 270 top
C67  1u  [.0603-B-NOSILK]  65.8,10.2 270 top
C68  1u  [.0603-B-NOSILK]  71,12.9 90 top
C69  10n  [.0603-B-NOSILK]  71,9.6 270 top
C70  100n  [.0603-B-NOSILK]  69.4,12.9 90 top
C79  1u  [.0603-B-NOSILK]  70.2,22.3 270 top
C80  100p  [.0603-B-NOSILK]  71.7,22.3 270 top
C81  56p  [.0402-C-NOSILK]  81.8,67.4 270 top
C82  100n  [.0603-B-NOSILK]  79.8,14.5 180 top
C83  100n  [.0603-B-NOSILK]  62,54.3 90 top
C84  100n  [.0603-B-NOSILK]  59.8,46.5 0 top
C85  DSK-3R3H334T-HL  [CAP-ELNA-DS-SERIES]  83.69,7.81 90 top
CM1  J-MOLEX-SMPM-73300-003X  [J-MOLEX-SMPM-073300-003X]  77.9,90.6 0 top
D1  GREEN  [LED-0603]  26,5.4 270 top
D2  BLUE  [LED-0603]  28,5.4 270 top
D3  BLUE  [LED-0603]  30,5.4 270 top
D4  BLUE  [LED-0603]  32,5.4 270 top
D5  BLUE  [LED-0603]  34,5.4 270 top
D6  AMBER  [LED-0603]  9,74.4 90 top
D7  GREEN  [LED-0603]  68.5,80.9 270 top
D8  GREEN  [LED-0603]  72.5,80.9 270 top
D9  DIODE-0603  [0603-B-NOSILK-DIODE]  74.2,9.6 270 top
D10  Yellow  [LED-0603]  70.9,15.9 180 top
FB1  30Ω/1.8A  [0603]  54.56,6.28 270 top
FB2  30Ω/1.8A  [0603]  50.5,10.9 90 top
J1  ORESAT-DEBUG-CONNECTOR-CARD  [TE_2-1734592-0]  45.25,6.65 180 top
J3  [1X03_LONGPADS]  17.2,23 180 top
J4  TFM-120-01-L-D-RA  [J-SAMTEC-TFM-120-X1-XXX-D-RA]  49.9,87.89 0 top
J100  DM3BT-DSF-PEJS  [DM3BT-DSF-PEJS]  48.53,5.28 0 bottom
J102  FTSH-105-XX-X-DV-K  [CON10_2X5_DUK_FTSH]  11.8,63.2 90 bottom
JP1  JUMPER-SMT_2_NO_SILK  [SMT-JUMPER_2_NO_SILK]  16.6,41.1 0 bottom
JP2  [1X06]  60.4,16.02 270 top
JP100  JUMPER-SMT_2_NC_TRACE_SILK  [SMT-JUMPER_2_NC_TRACE_SILK]  35.5,46.9 0 bottom
JP101  JUMPER-SMT_2_NC_TRACE_SILK  [SMT-JUMPER_2_NC_TRACE_SILK]  49.17,55.37 90 bottom
JP104  JUMPER-SMT_2_NC_TRACE_SILK  [SMT-JUMPER_2_NC_TRACE_SILK]  51.3,55.4 90 bottom
JP105  JUMPER-SMT_3_1-NC_TRACE_SILK  [SMT-JUMPER_3_1-NC_TRACE_SILK]  13.3,57.2 0 bottom
JP106  JUMPER-SMT_3_1-NC_TRACE_SILK  [SMT-JUMPER_3_1-NC_TRACE_SILK]  13.3,54.2 0 bottom
JP107  JUMPER-SMT_3_1-NC_TRACE_SILK  [SMT-JUMPER_3_1-NC_TRACE_SILK]  13.3,51.2 0 bottom
JP108  JUMPER-SMT_3_1-NC_TRACE_SILK  [SMT-JUMPER_3_1-NC_TRACE_SILK]  13.3,48.2 180 bottom
JP109  JUMPER-SMT_3_1-NC_TRACE_SILK  [SMT-JUMPER_3_1-NC_TRACE_SILK]  13.3,45.2 180 bottom
L1  6.8u  [ECS-MPI4040]  64.76,74.12 90 top
L3  5.6n  [.0402-B-NOSILK]  79.4,46.8 270 top
PCB1  ORESAT-CARD-V1.3-GENERIC-1RF-POS2  [ORESAT-CARD-V1.3-GENERIC-1RF-POS2]  0,0 0 top
Q1  MMBT2907  [SOT23-BEC]  50,58.9 270 top
Q2  PMV45EN  [SOT23]  39.47,69.9 180 top
Q3  DMP2240UDM  [SOT23-6]  25,70.9 90 top
Q4  PMV45EN  [SOT23]  39.5,75.96 0 top
Q5  MOSFET-PCH-SOT23-6  [SOT23-6]  51,80.4 90 top
Q6  MOSFET-PCH-SOT23-6  [SOT23-6]  40,81.4 90 top
R1  1k  [.0603-A]  26,8.4 270 top
R2  1k  [.0603-A]  28,8.4 270 top
R3  1k  [.0603-A]  30,8.4 270 top
R4  1k  [.0603-A]  32,8.4 270 top
R5  1k  [.0603-A]  34,8.4 270 top
R6  10k  [.0603-A]  51.5,14.4 270 top
R7  10k  [.0603-A]  57.5,14.4 90 top
R8  10K  [ARRAY_EXBA-M]  53.5,27.9 270 top
R9  10K  [ARRAY_EXBA-M]  23,33.9 90 top
R10  10K  [ARRAY_EXBA-M]  31,33.9 90 top
R11  20k  [.0603-B-NOSILK]  67,45.8 90 top
R12  10k  [.0603-B-NOSILK]  71.1,33.2 180 top
R13  1M  [.0603-A]  45.41,42.56 270 top
R14  10k  [.0603-B-NOSILK]  75.3,28.8 0 top
R15  10k  [.0603-A]  46.41,48.43 180 top
R16  10k  [.0603-B-NOSILK]  80.5,37.5 90 top
R17  1k  [.0603-B-NOSILK]  70.1,18.4 90 top
R18  10k  [.0603-B-NOSILK]  74.1,27.3 0 top
R19  10k  [.0603-A]  12.3,64.7 0 top
R20  10k  [.0603-A]  12.3,62.7 0 top
R21  33k  [.0603-B-NOSILK]  70.2,25.6 90 top
R22  10k  [.0603-A]  12.3,58.7 0 top
R23  499  [.0603-A]  46.5,58.65 270 top
R24  100K  [ARRAY_EXBA-M]  13.3,54.2 0 top
R25  100K  [ARRAY_EXBA-M]  13.3,46.7 0 top
R26  100K  [ARRAY_EXBA-M]  13.3,39.2 180 top
R27  DNP  [.0603-A]  29.19,61.09 0 top
R28  10k  [.0603-A]  46.5,62.27 270 top
R29  10k  [.0603-B-NOSILK]  71.7,18.4 90 top
R30  10k  [.0603-B-NOSILK]  67.8,51.9 0 top
R31  40.2K  [.0603-A]  53.5,62.9 90 top
R32  10k  [.0603-A]  39.5,67.34 0 top
R33  NP  [.0603-A]  46,67.4 0 top
R34  10k  [.0603-A]  56,67.4 180 top
R35  665k  [.0603-A]  29.5,67.9 180 top
R36  1M  [.0603-A]  15,68.9 90 top
R37  330k  [.0603-A]  17,68.9 90 top
R38  NP  [.0603-A]  46,69.4 0 top
R39  10k  [.0603-A]  51,69.4 180 top
R40  NP  [.0603-A]  56,69.4 180 top
R41  100  [.0603-A]  29.5,69.9 180 top
R42  NP  [.0603-A]  51,71.4 180 top
R43  665k  [.0603-A]  29.5,71.9 180 top
R44  1M  [.0603-A]  15,72.9 270 top
R45  330k  [.0603-A]  17,72.9 270 top
R46  10k  [.0603-A]  39.5,72.96 180 top
R47  0  [.0603-A]  51,73.4 0 top
R48  100  [.0603-A]  29.5,73.9 180 top
R49  2.7k  [.0603-A]  10.81,74.4 90 top
R50  0  [.0603-A]  51,75.4 0 top
R51  NP  [.0603-A]  51,77.4 180 top
R52  10k  [.0603-A]  40,78.53 180 top
R53  NP  [.0603-A]  8.94,80.4 270 top
R54  NP  [.0603-A]  10.75,80.4 90 top
R55  NP  [.0603-A]  12.56,80.4 270 top
R56  NP  [.0603-A]  14.38,80.4 90 top
R57  NP  [.0603-A]  16.19,80.4 270 top
R58  NP  [.0603-A]  18,80.4 90 top
R59  DNP  [.0603-A]  54,59.4 180 top
R60  DNP  [.0603-A]  54,57.4 0 top
R61  2.7k  [.0603-A]  66.5,80.9 90 top
R62  2.7k  [.0603-A]  70.5,80.9 270 top
R63  100m  [R1206]  45.53,81.37 0 top
R64  10k  [.0603-A]  51,83.4 180 top
R65  NP  [.0603-A]  8.94,84.03 270 top
R66  NP  [.0603-A]  10.75,84.03 90 top
R67  NP  [.0603-A]  12.56,84.03 270 top
R68  NP  [.0603-A]  14.38,84.03 90 top
R69  NP  [.0603-A]  16.19,84.03 270 top
R70  NP  [.0603-A]  18,84.03 90 top
R71  100  [.0603-A]  28,86.9 180 top
R72  10k  [.0603-A]  28,88.9 180 top
R73  100  [.0603-A]  38.53,64.4 270 top
R74  100  [.0603-A]  40.34,64.4 270 top
R75  100  [.0603-A]  36.72,64.4 270 top
R76  100  [.0603-B-NOSILK]  74.2,6.53 90 top
R77  10k  [0402-C-NOSILK@1]  82.1,69 180 top
R78  10k  [.0603-B-NOSILK]  59.8,44.9 0 top
R79  10k  [.0603-B-NOSILK]  65.8,7.2 90 top
R80  10k  [.0603-B-NOSILK]  79.8,27.8 270 top
R81  10k  [.0603-B-NOSILK]  73.2,13.5 90 top
SH1  BMI-S-202-SHIELD  [BMI-S-202]  82.3,62 270 top
TP1  TEST-POINT3X4  [PAD.03X.04]  56.5,7.4 0 top
TP2  TEST-POINT3X4  [PAD.03X.04]  39.5,17.9 90 top
TP3  TEST-POINT3X4  [PAD.03X.04]  51.5,17.9 90 top
TP4  TEST-POINT3X4  [PAD.03X.04]  32.84,30.09 90 top
TP5  TEST-POINT15MIL-TEST-POINT  [15MIL-TEST-POINT]  71,35 90 top
TP6  TEST-POINT15MIL-TEST-POINT  [15MIL-TEST-POINT]  73.2,29 0 top
TP7  TEST-POINT15MIL-TEST-POINT  [15MIL-TEST-POINT]  77.4,27.1 0 top
TP8  TEST-POINT15MIL-TEST-POINT  [15MIL-TEST-POINT]  78.2,11.6 0 top
TP9  TEST-POINT15MIL-TEST-POINT  [15MIL-TEST-POINT]  71.5,42.5 180 top
TP11  TEST-POINT15MIL-TEST-POINT  [15MIL-TEST-POINT]  72.3,10.9 0 top
TP12  TEST-POINT3X4  [PAD.03X.04]  39.8,57.8 0 bottom
TP13  TEST-POINT3X4  [PAD.03X.04]  44.7,52 0 top
TP14  TEST-POINT3X4  [PAD.03X.04]  19.8,45.2 90 top
TP15  TEST-POINT15MIL-TEST-POINT  [15MIL-TEST-POINT]  67.91,61.87 90 top
TP16  TEST-POINT3X4  [PAD.03X.04]  42.4,56.4 0 bottom
TP17  TEST-POINT3X4  [PAD.03X.04]  41.1,57.1 0 bottom
TP18  TEST-POINT3X4  [PAD.03X.04]  40.2,54.3 0 bottom
TP19  TEST-POINT3X4  [PAD.03X.04]  41.9,54 0 bottom
TP20  TEST-POINT-LARGE-SQUARE  [1X01]  58,65.8 0 top
TP21  TEST-POINT-LARGE-SQUARE  [1X01]  59.7,65.8 0 top
TP22  TEST-POINT3X4  [PAD.03X.04]  50.12,47.93 0 top
TP23  TEST-POINT3X4  [PAD.03X.04]  26.12,55.4 0 bottom
TP24  TEST-POINT3X4  [PAD.03X.04]  26.12,56.92 0 bottom
TP25  TEST-POINT3X4  [PAD.03X.04]  26.92,11.78 0 top
TP26  TEST-POINT3X4  [PAD.03X.04]  23,59.9 0 bottom
TP27  TEST-POINT15MIL-TEST-POINT  [15MIL-TEST-POINT]  72.2,27.7 0 top
TP28  TEST-POINT15MIL-TEST-POINT  [15MIL-TEST-POINT]  68.9,24.8 180 top
TP29  TEST-POINT15MIL-TEST-POINT  [15MIL-TEST-POINT]  67.9,18.6 0 top
TP30  TEST-POINT3X4  [PAD.03X.04]  24.28,60.68 0 top
TP31  TEST-POINT3X4  [PAD.03X.04]  11.8,67.2 270 top
TP32  TEST-POINT3X4  [PAD.03X.04]  22.5,60.7 0 top
TP33  TEST-POINT-LARGE-SQUARE  [1X01]  58,64.1 0 top
TP34  TEST-POINT-LARGE-SQUARE  [1X01]  56.3,64.1 0 top
TP35  TEST-POINT3X4  [PAD.03X.04]  16,65.8 270 top
TP38  TEST-POINT3X4  [PAD.03X.04]  34.19,62.45 0 top
TP39  TEST-POINT3X4  [PAD.03X.04]  33.64,63.7 0 top
TP40  TEST-POINT3X4  [PAD.03X.04]  17.1,64.9 270 top
TP41  TEST-POINT  [2MM-TEST-POINT]  23,65.9 0 top
TP42  TEST-POINT  [2MM-TEST-POINT]  26,65.9 0 top
TP43  TEST-POINT  [2MM-TEST-POINT]  29,65.9 0 top
TP44  TEST-POINT  [2MM-TEST-POINT]  32,65.9 0 top
TP45  TEST-POINT  [2MM-TEST-POINT]  35,66.9 0 top
TP46  TEST-POINT  [2MM-TEST-POINT]  63,67.4 0 top
TP47  TEST-POINT  [2MM-TEST-POINT]  35,69.9 0 top
TP48  TEST-POINT  [2MM-TEST-POINT]  63,70.4 270 top
TP49  TEST-POINT  [2MM-TEST-POINT]  66,70.4 270 top
TP50  TEST-POINT  [2MM-TEST-POINT]  35,72.9 0 top
TP51  TEST-POINT  [2MM-TEST-POINT]  31,75.9 0 top
TP52  TEST-POINT  [2MM-TEST-POINT]  35,75.9 0 top
TP53  TEST-POINT  [2MM-TEST-POINT]  31,78.9 0 top
TP54  TEST-POINT  [2MM-TEST-POINT]  35,78.9 0 top
TP55  TEST-POINT  [2MM-TEST-POINT]  56,79.9 0 top
TP56  TEST-POINT  [2MM-TEST-POINT]  31,81.9 0 top
TP57  TEST-POINT  [2MM-TEST-POINT]  35,81.9 0 top
TP58  TEST-POINT3X4  [PAD.03X.04]  55.5,83.9 270 top
TP59  TEST-POINT3X4  [PAD.03X.04]  57.5,83.9 270 top
TP60  TEST-POINT3X4  [PAD.03X.04]  59.5,83.9 270 top
TP61  TEST-POINT3X4  [PAD.03X.04]  61.5,83.9 270 top
TP62  TEST-POINT3X4  [PAD.03X.04]  63.5,83.9 270 top
TP63  TEST-POINT  [2MM-TEST-POINT]  31,84.9 0 top
TP64  TEST-POINT  [2MM-TEST-POINT]  35,84.9 0 top
TP65  TEST-POINT  [2MM-TEST-POINT]  20.94,86.03 0 top
TP66  TEST-POINT  [2MM-TEST-POINT]  23.44,86.03 0 top
TP67  TEST-POINT  [2MM-TEST-POINT]  24,74.9 0 top
TP68  TEST-POINT  [2MM-TEST-POINT]  26.5,74.9 0 top
TP69  TEST-POINT3X4  [PAD.03X.04]  57,49.9 0 top
TP70  TEST-POINT3X4  [PAD.03X.04]  53.7,62.5 0 bottom
TP71  TEST-POINT-LARGE-SQUARE  [1X01]  61.6,42.7 0 top
TP72  TEST-POINT-LARGE-SQUARE  [1X01]  56.3,62.4 0 top
TP100  TEST-POINT3X4  [PAD.03X.04]  35.16,37.71 0 bottom
TP101  TEST-POINT3X4  [PAD.03X.04]  36.56,37.71 0 bottom
TP102  TEST-POINT3X4  [PAD.03X.04]  37.94,37.77 0 bottom
TP103  TEST-POINT3X4  [PAD.03X.04]  41.5,37.9 0 bottom
TP104  TEST-POINT3X4  [PAD.03X.04]  27.94,37.96 0 bottom
TP105  TEST-POINT3X4  [PAD.03X.04]  29.25,37.96 0 bottom
TP106  TEST-POINT3X4  [PAD.03X.04]  30.56,37.96 0 bottom
TP107  TEST-POINT3X4  [PAD.03X.04]  31.91,37.96 0 bottom
TP108  TEST-POINT3X4  [PAD.03X.04]  42.75,38.37 0 bottom
TP109  TEST-POINT3X4  [PAD.03X.04]  21.1,41.8 0 bottom
TP110  TEST-POINT3X4  [PAD.03X.04]  20.94,39.17 0 bottom
TP111  TEST-POINT3X4  [PAD.03X.04]  43.72,39.4 0 bottom
TP112  TEST-POINT3X4  [PAD.03X.04]  55,46.9 270 bottom
TP114  TEST-POINT3X4  [PAD.03X.04]  41.34,40.31 0 bottom
TP115  TEST-POINT3X4  [PAD.03X.04]  30.59,40.84 0 bottom
TP117  TEST-POINT3X4  [PAD.03X.04]  42.78,41.24 0 bottom
TP118  TEST-POINT3X4  [PAD.03X.04]  36.28,41.27 0 bottom
TP120  TEST-POINT3X4  [PAD.03X.04]  32.31,41.56 0 bottom
TP121  TEST-POINT3X4  [PAD.03X.04]  33.47,41.59 90 bottom
TP122  TEST-POINT3X4  [PAD.03X.04]  26.75,41.87 0 bottom
TP123  TEST-POINT3X4  [PAD.03X.04]  28.09,41.87 0 bottom
TP124  TEST-POINT3X4  [PAD.03X.04]  29.41,41.87 0 bottom
TP125  TEST-POINT3X4  [PAD.03X.04]  40.62,41.9 0 bottom
TP126  TEST-POINT3X4  [PAD.03X.04]  37.62,42.81 0 bottom
TP127  TEST-POINT3X4  [PAD.03X.04]  22.14,43.21 0 bottom
TP128  TEST-POINT3X4  [PAD.03X.04]  20,43.2 0 bottom
TP129  TEST-POINT3X4  [PAD.03X.04]  30.84,43.65 90 bottom
TP130  TEST-POINT3X4  [PAD.03X.04]  33,43.65 90 bottom
TP131  TEST-POINT3X4  [PAD.03X.04]  25.28,43.77 0 bottom
TP132  TEST-POINT3X4  [PAD.03X.04]  26.56,43.84 90 bottom
TP133  TEST-POINT3X4  [PAD.03X.04]  38.5,43.9 90 bottom
TP134  TEST-POINT3X4  [PAD.03X.04]  21,44.2 0 bottom
TP135  TEST-POINT3X4  [PAD.03X.04]  42.91,44.49 0 bottom
TP136  TEST-POINT3X4  [PAD.03X.04]  41.81,44.99 90 bottom
TP137  TEST-POINT3X4  [PAD.03X.04]  42.91,45.71 0 bottom
TP138  TEST-POINT3X4  [PAD.03X.04]  41,45.9 0 bottom
TP139  TEST-POINT3X4  [PAD.03X.04]  42.06,46.68 0 bottom
TP140  TEST-POINT3X4  [PAD.03X.04]  26.5,46.9 90 bottom
TP141  TEST-POINT3X4  [PAD.03X.04]  40.88,47.4 0 bottom
TP142  TEST-POINT3X4  [PAD.03X.04]  52,49.9 0 bottom
TP144  TEST-POINT3X4  [PAD.03X.04]  35.66,48.84 0 bottom
TP145  TEST-POINT3X4  [PAD.03X.04]  26.66,48.9 0 bottom
TP146  TEST-POINT3X4  [PAD.03X.04]  51,50.9 0 bottom
TP147  TEST-POINT3X4  [PAD.03X.04]  53.7,60.1 0 bottom
TP148  TEST-POINT3X4  [PAD.03X.04]  40.31,49.21 0 bottom
TP149  TEST-POINT3X4  [PAD.03X.04]  41.5,49.21 0 bottom
TP150  TEST-POINT3X4  [PAD.03X.04]  31.1,48.2 0 bottom
TP151  TEST-POINT3X4  [PAD.03X.04]  54,47.9 90 bottom
TP152  TEST-POINT3X4  [PAD.03X.04]  24,50.4 0 bottom
TP153  TEST-POINT3X4  [PAD.03X.04]  25.5,50.4 0 bottom
TP154  TEST-POINT3X4  [PAD.03X.04]  27.5,50.4 0 bottom
TP155  TEST-POINT3X4  [PAD.03X.04]  53,48.9 90 bottom
TP156  TEST-POINT3X4  [PAD.03X.04]  27.3,53.1 0 bottom
TP157  TEST-POINT3X4  [PAD.03X.04]  29,51.8 0 bottom
TP158  TEST-POINT3X4  [PAD.03X.04]  39.62,55.37 0 bottom
TP159  TEST-POINT3X4  [PAD.03X.04]  24.5,52.4 0 bottom
TP160  TEST-POINT3X4  [PAD.03X.04]  37.64,49.08 0 bottom
TP161  TEST-POINT3X4  [PAD.03X.04]  35.1,53.7 90 bottom
TP162  TEST-POINT3X4  [PAD.03X.04]  21.56,52.93 0 bottom
TP163  TEST-POINT3X4  [PAD.03X.04]  33,52.96 90 bottom
TP164  TEST-POINT3X4  [PAD.03X.04]  51.3,53.18 90 bottom
TP165  TEST-POINT3X4  [PAD.03X.04]  49.17,53.21 90 bottom
TP166  TEST-POINT3X4  [PAD.03X.04]  38.9,49.1 0 bottom
TP167  TEST-POINT3X4  [PAD.03X.04]  26.12,54.02 90 bottom
TP168  TEST-POINT3X4  [PAD.03X.04]  28.69,54.15 0 bottom
TP169  TEST-POINT3X4  [PAD.03X.04]  34,54.2 0 bottom
TP170  TEST-POINT3X4  [PAD.03X.04]  30.5,54.71 0 bottom
TP171  TEST-POINT3X4  [PAD.03X.04]  31.81,54.71 0 bottom
TP172  TEST-POINT3X4  [PAD.03X.04]  37.31,56.1 0 bottom
TP173  TEST-POINT3X4  [PAD.03X.04]  27.5,55.4 0 bottom
TP174  TEST-POINT3X4  [PAD.03X.04]  38.5,55.8 0 bottom
TP175  TEST-POINT3X4  [PAD.03X.04]  28.69,55.46 0 bottom
TP176  TEST-POINT3X4  [PAD.03X.04]  30.5,55.9 0 bottom
TP177  TEST-POINT3X4  [PAD.03X.04]  37.5,57.78 0 bottom
TP178  TEST-POINT3X4  [PAD.03X.04]  38.72,58.38 0 bottom
TP179  TEST-POINT3X4  [PAD.03X.04]  34.07,55.67 0 bottom
TP180  TEST-POINT3X4  [PAD.03X.04]  27.5,56.92 0 bottom
TP181  TEST-POINT3X4  [PAD.03X.04]  28.69,56.92 0 bottom
TP182  TEST-POINT3X4  [PAD.03X.04]  30.96,60.58 0 bottom
TP183  TEST-POINT3X4  [PAD.03X.04]  40,84.4 0 bottom
TP184  TEST-POINT3X4  [PAD.03X.04]  42,84.4 0 bottom
U1  RCLAMP0504FB  [SC70-6]  47,12.65 90 top
U2  TPS2051CDBVR  [DBV5]  54.5,14.4 90 top
U3  THGBMJG7C2LBAU8  [BGA-153(11.5X13)(EMMC-BA)]  31.5,19.9 0 top
U4  SN74LVC1G07DCK  [C70(TI-DCK)]  19.2,40.7 180 top
U5  SKY65723-81  [SKY65723-81]  79.9,67.2 0 top
U6  7Q-16.368MBG-T  [TCX_7Q]  67.7,38.8 0 top
U7  OSD3358-512M-BSM  [OSD335X-BGA-256]  33,48.9 270 top
U8  MAX8510EXK29+T  [SC70]  65.3,34.2 270 top
U9  MAX8510EXK29+T  [SC70]  69.43,56.79 0 top
U10  TLVH431  [SOT23-3]  50,62.4 270 top
U11  TCAN330  [SOT23-8_TI-DCN]  17.3,62.2 90 top
U12  MIC842LYC5  [SC70-5]  19.5,68.9 180 top
U13  MIC842LYC5  [SC70-5]  19.5,72.9 180 top
U14  MAX4211FETE  [QFN65P400X400X80-17T210]  46,73.9 0 top
U15  TPS62112  [S-PVQFN-16]  59.46,74.12 270 top
U16  MAX7310ATE  [QFN65P400X400X80-17T210]  26.5,81.4 0 top
U17  25AAXX  [SOIC8]  54,53.4 180 top
U18  RCLAMP0504FB  [SC70-6]  43.5,64.49 270 top
U19  BP2G+  [MINICIRCUITS]  82.3,60.2 180 top
U20  MAX8510EXK29+T  [SC70]  68.4,10 270 top
U21  SF14-1575F5UUA1  [SAW_1.4X1.1]  75.1,46.5 180 top
U22  LT1719S6  [SOT23-6']  61,49.8 180 top
U23  MAX2771ETI+  [90-0023]  75.1,42.2 0 top
U24  VENUS838LPX-L  [VENUS838LPX]  78.2,20.8 0 top
U$3  [PSAS_LOGO_10X10]  87.5,84.4 0 top
U$4  [FLIGHTMARKER_OLD_BOARDS]  5.7,50.5 90 top
Y1  24MHz  [5X3.2-4SMD]  48.41,42.56 90 top
Y2  ABS07-32.768KHZ-T  [CRYSTAL_3.2X1.5]  29.19,63.21 0 top

## Library data of the parts
C1-C32 C34-C46 C50-C57 C60-C65 C69 C70 C79 C80 C82-C84 L3 R1-R7 R11-R23 R27-R32 R34-R37 R39 R41 R43-R50 R52 R59-R62 R64 R71-R76 R78-R81 = oresat-rcl
C33 = oresat-rcl; DIS: Digi-Key; DPN: 1276-1001-1-ND; MFR: Samsung; MPN: CL05B104KO5NNNC
C47-C49 C58 C59 C67 C68 C81 R77 = rcl_custom
C85 = cap-elna-ds
CM1 = J-Molex-73300-003X-SMPM-M-edge-mount; DESCRIPTION: SMPM Edge Mounted 50 ohm RF connector; DIST: Digi-Key; DIST_PN: WM10772-ND; GENERIC: N; MFG: MOLEX; MFG_PN: 0733000020; P-NP: P
D1 D7 D8 = SparkFun-LED; PROD_ID: DIO-00821
D2-D5 = SparkFun-LED; PROD_ID: DIO-08575
D6 = SparkFun-LED
D9 = diode-0603
D10 = SparkFun-LED; PROD_ID: DIO-09003
FB1 FB2 = SparkFun-Coils; DPN: 490-14027-1-ND; MPN: BLM18KG300JH1D; PROD_ID: NDUC-13805
J1 = oresat-debug-connector; DPN: A100287CT-ND; MPN: 2-1734592-0
J3 TP1-TP4 TP12-TP14 TP16-TP19 TP22-TP26 TP30-TP32 TP35 TP38-TP40 TP58-TP62 TP69 TP70 TP100-TP112 TP114 TP115 TP117 TP118 TP120-TP142 TP144-TP184 = SparkFun-Connectors
J4 = J-Samtec-TFM-120-X1-XXX-D-RA; DPN: SAM10145-ND; MPN: TFM-120-01-L-D-RA
J100 = J-Hirose-DM3BT-DSF-PEJS; DIS: Digi-Key; DPN: HR1942CT-ND; MFR: Hirose Electric; MPN: DM3BT-DSF-PEJS
J102 = J-Samtec-FTSH-105-XXX-DV-K-ARM-SWD
JP1 JP100 JP101 JP104-JP109 = SparkFun-Jumpers
JP2 = pinhead
L1 = L-ECS-MPI4040; DPN: XC2337CT-ND; MPN: ECS-MPI4040R4-6R8-R
PCB1 = oresat-cards
Q1 = Q-Diodesinc-MMBT2907-PNP; DPN: MMBT2907A-FDICT-ND; MPN: MMBT2907A-7-F
Q2 Q4 = Tova; DPN: 1727-2307-1-ND; MPN: PMV45EN2R
Q3 = Q-MOSFET-PCH-dual-SOT23-6; DPN: DMP2240UDMDICT-ND; MPN: DMP2240UDM-7
Q5 Q6 = Q-MOSFET-PCH-SOT23-6; DPN: DMP3050LVT-7DICT-ND; MPN: DMP3050LVT-7
R8-R10 = R-Panasonic-EXB_A10PXXXJ; DPN: U7103CT-ND; MFR: Panasonic Electronic Components; MPN: EXB-A10P103J
R24-R26 = R-Panasonic-EXB_A10PXXXJ; DPN: U7104CT-ND; MFR: Panasonic Electronic Components; MPN: EXB-A10P104J
R33 R38 R40 R42 R51 R53-R58 R65-R70 = oresat-rcl; DIS: Digi-Key; DPN: 1276-4275-1-ND; MFR: Samsung; MPN: RC1005F6653CS
R63 = rcl; SPICEPREFIX: R
SH1 = hw-laird-bmi-s-202; DIS: Digi-Key; DPN: 903-1014-ND; MFR: Laird Technologies EMI; MPN: BMI-S-202-C
TP5-TP9 TP11 TP15 TP27-TP29 TP41-TP57 TP63-TP68 = Tova
TP20 TP21 TP33 TP34 TP71 TP72 = oresat-misc
U1 U18 = U-Semtec-RCLAMP0504FB; DPN: RCLAMP0504FBTCTCT-ND; MPN: RCLAMP0504FBTCT
U2 = U-TI-TPS2051C; DPN: 296-29537-1-ND; MFR: Texas Instruments; MPN: TPS2051CDBVR
U3 = U-Generic-eMMC-153pin; DPN: THGBMJG7C2LBAU8-ND; MPN: THGBMJG7C2LBAU8
U4 = U-TI-SN74LVC1G07DCK-Buffer; DPN: 296-8486-1-ND; MPN: SN74LVC1G07DCKR
U5 = U-Skyworks-SKY65723-81-GPS-LNA-with-filter; DIS: Digi-Key; DPN: 863-2063-1-ND; MFR: Skyworks Solutions; MPN: SKY65723-81
U6 = swift-nav; MFR: TXC Corporation
U7 = U-OSD3358-512M-BSM; DPN: 1676-1002-ND; MFR: Octavo Systems; MPN: OSD3358-512M-BSM; PACKAGE: BGA-400 Octavo Systems
U8 U9 U20 = SparkFun-PowerIC; DIS: Digi-Key; DPN: MAX8510EXK29+TCT-ND; MFR: Maxim Integrated; MPN: MAX8510EXK29+T
U10 = U-TI-TLVH431-Shunt-Regulator; DPN: 296-36778-1-ND; MPN: TLVH431BQDBZRQ1
U11 = U-TI-TCAN330-CAN-transceiver; DPN: 296-44211-1-ND; MPN: TCAN330GDCNT
U12 U13 = U-Microchip-MIC842-Comparator; DPN: 576-2927-1-ND; MPN: MIC842LYC5
U14 = U-Maxim-MAX4211-power-monitor; DPN: MAX4211FETE+-ND; MPN: MAX4211FETE+
U15 = U-TI-TPS6211x-SPS-buck; DPN: 296-39444-1-ND; MPN: TPS62112RSAR
U16 = U-Maxim-MAX7310-I2C-GPIO-expander; DPN: MAX7310ATE+-ND; MFR: Maxim; MPN: MAX7310ATE
U17 = U-Generic-SPI-EEPROM; MPN: 25AA02E48T-I/SN
U19 = minicircuits-splitter
U21 = saw_1.4x1.1; DIS: Digi-Key; DPN: 478-6834-1-ND; MFR: Kyocera International; MPN: SF14-1575F5UUA1
U22 = ic-comparator-linear-lt1719
U23 = U-Maxim-MAX2771-Multiband-Universal-GNSS-Receiver; DIS: Digi-Key; DPN: MAX2771ETI+-ND; MFR: Maxim Integrated; MPN: MAX2771ETI+
U24 = U-Venus-Venus838LPxL-GPS-Module
U$3 = psas-logo
U$4 = oresat-flight-marker
Y1 = X-ECS-240-12-30BQ-AEN-TR; DPN: XC2580CT-ND; MPN: ECS-240-12-30BQ-AEN-TR
Y2 = OSD3358-SM-RED Platform; DPN: 535-9542-1-ND; MPN: ABS07-32.768KHZ-T

## Nets
2.85V-S: C52.1 C54.1 C68.1 C69.1 C70.1 C79.1 C80.1 D9.ANODE D10.A R21.2 R29.1 R80.1 R81.1 TP11.P$1 U20.5 U24.2 U24.58
2.85VA: C20.1 C21.1 C25.1 C26.1 C27.1 C28.1 C44.1 C45.1 C49.1 C50.1 C55.1 C56.1 C58.1 C81.1 R77.1 TP15.P$1 U5.1 U9.5 U23.2 U23.22 U23.27 U23.28
2.85VD: C23.1 C24.1 C42.1 C43.1 C51.1 C53.1 C57.1 C59.1 C60.1 C65.1 R12.2 TP5.P$1 U6.4 U8.5 U23.6 U23.14
3.3V: C2.1 C3.1 C5.1 C6.1 C8.1 C9.1 C11.1 C31.2 C40.2 C47.1 C48.1 C67.1 C83.1 J3.1 J100.4 J102.1 R1.1 R8.5 R8.10 R9.5 R9.10 R10.5 R10.10 R20.2 R22.2 R24.5 R24.10 R60.1 TP25.P$1 U3.C6 U3.E6 U3.F5 U3.J10 U3.K9 U3.M4 U3.N4 U3.P3 U3.P5 U7.F6 U7.F7 U7.G6 U7.G7 U8.1 U9.1 U11.3 U17.8 U20.1 U22.4
3.3VA: C41.1 JP101.1 TP165.P$1 U7.F8 U7.F9 U7.G8 U7.G9 U7.H7 U7.H8 U7.H9 U7.J7 U7.J8 U7.J9 U7.K8 U7.K9 U7.L8 U7.L9 U18.5
5V: C14.1 C36.1 L1.2 R62.2 TP49.1 U7.P10 U7.R10 U7.T10 U15.10
!FAULT: Q2.3 R32.1 TP45.1 U16.7
!SD: J4.39 J4.40
AD0: R57.1 R58.2 R69.2 R70.1 U16.1
AD1: R55.1 R56.2 R67.2 R68.1 U16.2
AD2: R53.1 R54.2 R65.2 R66.1 U16.3
BOOT0: TP51.1 U16.10
CAN1_H: J4.33 J4.34 TP184.P$1
CAN1_L: J4.35 J4.36 TP183.P$1
CAN2_H: J4.17 J4.18 U11.7
CAN2_L: J4.19 J4.20 U11.6
CB-RESET: R39.2 TP54.1 U14.9 U16.9
CB_CTRL: Q2.1 Q5.3 R64.1 TP52.1 U14.3 U14.4 U14.6
CPOUT: C16.1 R11.1 U23.1
EEPROM_WP: J1.20 R75.1 TP112.P$1 U18.6
GND: C1.2 C2.2 C3.2 C4.2 C5.2 C6.2 C7.2 C8.2 C9.2 C10.2 C11.2 C12.2 C13.2 C14.2 C15.2 C16.2 C17.2 C18.2 C20.2 C21.2 C23.2 C24.2 C25.2 C26.2 C27.2 C28.2 C31.1 C32.2 C34.2 C35.2 C36.2 C37.2 C38.2 C39.1 C40.1 C41.2 C42.2 C43.2 C44.2 C45.2 C47.2 C48.2 C49.2 C51.2 C52.2 C53.2 C54.2 C55.2 C56.2 C57.2 C58.2 C59.2 C61.1 C62.2 C64.1 C65.2 C67.2 C68.2 C70.2 C79.2 C80.2 C81.2 C82.1 C83.2 C84.2 C85.- CM1.P$1 CM1.P$2 CM1.P$3 CM1.P$4 D1.C D2.C D3.C D4.C D5.C D6.C D7.C D8.C J1.3 J1.6 J1.9 J1.PAD1 J1.PAD2 J3.3 J4.27 J4.28 J4.29 J4.30 J4.31 J4.32 J4.37 J4.38 J100.6 J100.CGND1 J100.CGND2 J100.CGND3 J100.CGND4 J100.CGND5 J100.CGND6 J100.GND J102.3 J102.5 J102.9 JP2.6 JP100.2 Q2.2 Q4.2 R6.1 R15.1 R16.1 R19.1 R25.5 R25.10 R26.5 R26.10 R30.1 R33.1 R39.1 R40.1 R42.1 R46.1 R51.1 R54.1 R56.1 R58.1 R59.2 R79.1 SH1.P$1 SH1.P$2 SH1.P$3 SH1.P$4 SH1.P$5 SH1.P$6 SH1.P$7 SH1.P$8 SH1.P$9 SH1.P$10 SH1.P$11 SH1.P$12 U1.2 U2.2 U3.C4 U3.E7 U3.G5 U3.H10 U3.J5 U3.K8 U3.N2 U3.N5 U3.P4 U3.P6 U4.3 U5.GND U6.1 U6.2 U7.D8 U7.D9 U7.E5 U7.E6 U7.E7 U7.E8 U7.E9 U7.E10 U7.E11 U7.E12 U7.F5 U7.F12 U7.G5 U7.G12 U7.H4 U7.H5 U7.H12 U7.H13 U7.J4 U7.J5 U7.J12 U7.J13 U7.K5 U7.K12 U7.L5 U7.L12 U7.M5 U7.M6 U7.M7 U7.M8 U7.M9 U7.M10 U7.M11 U7.M12 U7.N8 U7.N9 U8.2 U9.2 U11.2 U12.2 U13.2 U14.7 U14.EPAD U15.1 U15.6 U15.7 U15.9 U15.11 U15.12 U15.16 U15.PAD U16.6 U16.EPAD U17.4 U18.2 U19.1 U19.3 U19.4 U19.6 U19.7 U20.2 U21.2 U21.3 U21.5 U22.2 U22.6 U23.20 U23.26 U23.BODY U24.4 U24.5 U24.6 U24.10 U24.11 U24.15 U24.19 U24.21 U24.22 U24.24 U24.25 U24.27 U24.28 U24.29 U24.31 U24.33 U24.49 U24.60 U24.61 U24.62 U24.64 U24.65 U24.69 Y1.2 Y1.4
I0: TP20.1 U7.A2 U23.12
I1: TP21.1 U7.A1 U23.13
I2C0_SCL: J1.18 R73.1 TP155.P$1 U18.3
I2C0_SDA: J1.19 R74.1 TP151.P$1 U18.1
IOUT: R50.2 U14.14
LED: R17.2 TP29.P$1 U24.7
LNAOUT [RF]: U21.1 U23.24
MAX-CLKOUT: TP72.1 U7.B4 U22.5
MAX-EN: R30.2 TP19.P$1 U7.F16 U8.3 U9.3
MAX-RF [RF]: C63.1 U19.5
MAX_!SHDN: R16.2 TP148.P$1 U7.G14 U23.18
MAX_CLK_OUT: R78.2 TP71.1 U22.3 U23.4
MAX_LD: TP70.P$1 U7.G15 U23.17
MAX_SPI1_CS0: JP2.3 R12.1 U7.J14 U23.9
MAX_SPI1_D0: JP2.5 U7.F14 U23.7
MAX_SPI1_SCLK: JP2.4 U7.F15 U23.8
MIXIN [RF]: U21.4 U23.25
N$1: TP171.P$1 U7.A9 U7.B7 U7.B9
N$2: D5.A R5.2
N$3: TP170.P$1 U7.D7
N$4: J100.1 R8.9 U7.C16
N$5: J100.2 R8.2 U7.C15
N$6: J100.3 R8.8 U7.B16
N$7: J100.5 R8.3 U7.B15
N$8: J100.7 R8.7 U7.A16
N$9: J100.8 R8.4 U7.A15
N$10: J100.CD R8.6 TP22.P$1 U7.C14
N$11: U7.B11 U11.4
N$12: U7.A11 U11.1
N$13: TP40.P$1 U11.8
N$14: TP35.P$1 U11.5
N$15: TP23.P$1 U7.C4
N$16: TP24.P$1 U7.C3
N$17: TP26.P$1 U7.B3
N$18: TP32.P$1 U7.A3
N$19 [RF]: U5.6 U19.2
N$20: JP101.2 Q1.E R23.2 R28.2
N$21: R80.2 U24.37
N$22: R28.1 R31.2 U10.1
N$23: Q1.B R23.1 U10.2
N$24: R77.2 U5.2
N$25: C32.1 R36.1 R37.1 U12.1
N$27: R35.1 TP44.1 U12.4
N$28: U7.A13 U17.6
N$29: U7.B13 U17.2
N$30: U7.B14 U17.5
N$31: U7.A14 U17.1
N$32: R81.2 U24.14
N$33: TP30.P$1 U7.A4
N$34: TP180.P$1 U7.C5
N$35: TP104.P$1 U7.T4
N$36: TP123.P$1 U7.P5
N$37: TP115.P$1 U7.R5
N$38: TP105.P$1 U7.T5
N$39: TP124.P$1 U7.P6
N$40: TP120.P$1 U7.R6
N$41: TP125.P$1 U7.N14
N$42: TP114.P$1 U7.P15
N$43: TP111.P$1 U7.R16
N$44: TP177.P$1 U7.C12
N$45: TP178.P$1 U7.C13
N$46: TP162.P$1 U7.F1
N$47: TP153.P$1 U7.F3
N$48: TP152.P$1 U7.F2
N$49: TP159.P$1 U7.E1
N$51: TP174.P$1 U7.D13
N$52: TP158.P$1 U7.E13
N$53: TP12.P$1 U7.E14
N$54: TP137.P$1 U7.H15
N$55: TP149.P$1 U7.H14
N$56: TP135.P$1 U7.G16
N$57: TP172.P$1 U7.D12
N$58: TP150.P$1 U7.J6
N$59: TP145.P$1 U7.K4
N$60: TP157.P$1 U7.H6
N$61: TP173.P$1 U7.D5
N$62: TP166.P$1 U7.G13
N$63: TP160.P$1 U7.F13
N$64: TP154.P$1 U7.G4
N$65: TP156.P$1 U7.F4
N$66: TP179.P$1 U7.C9
N$67: TP169.P$1 U7.C8
N$68: TP176.P$1 U7.C7
N$69: TP175.P$1 U7.C6
N$70: TP181.P$1 U7.B6
N$71: TP38.P$1 U7.B8
N$72: TP39.P$1 U7.A8
N$73: TP141.P$1 U7.K13
N$74: TP139.P$1 U7.J15
N$75: TP106.P$1 U7.T7
N$76: TP100.P$1 U7.T12
N$77: TP118.P$1 U7.R12
N$78: TP126.P$1 U7.P12
N$79: TP101.P$1 U7.T13
N$80: D4.A R4.2
N$81: D3.A R3.2
N$82: TP108.P$1 U7.T15
N$83: TP117.P$1 U7.R15
N$84: TP103.P$1 U7.T16
N$85: TP122.P$1 U7.P3
N$86: TP107.P$1 U7.R7
N$87: D2.A R2.2
N$88: D1.A R1.2
N$89: TP182.P$1 U7.A7
N$90: TP168.P$1 U7.D6
N$91: R20.1 U7.E3
N$92: TP144.P$1 U7.L13
N$93: TP134.P$1 U7.M1
N$94: TP131.P$1 U7.N3
N$95: TP127.P$1 U7.N2
N$96: TP128.P$1 U7.N1
N$97: R14.2 U24.42
N$98: C62.1 Q6.1 Q6.2 Q6.5 Q6.6 R63.1 U14.16
N$99: Q5.4 R63.2 R64.2 U14.15
N$100: C35.1 R44.1 R45.1 U13.1
N$101: R22.1 U7.E2
N$102: JP100.1 U7.L14
N$103: J4.1 J4.2 TP62.P$1
N$104: TP138.P$1 U7.K14
N$105: JP105.1 R24.9
N$106: JP106.1 R24.2
N$107: JP108.3 R24.3
N$108: JP109.3 R24.6
N$109: JP107.3 R24.8
N$110: R59.1 R60.2 U17.3
N$111: TP69.P$1 U17.7
N$112: J102.10 JP1.2
N$113: C50.2 U9.4
N$114: R74.2 U7.C11 U7.D11
N$115: R75.2 U7.M2
N$116: R73.2 U7.C10 U7.D10
N$117: C60.2 U8.4
N$118: C69.2 U20.4
N$119: C17.1 R11.2
N$120: C46.1 U6.3
N$121: C84.1 R78.1 U22.1
N$122: R18.2 U24.44
N$123 [RF]: C63.2 C64.2 L3.1
N$124 [RF]: L3.2 U23.19
N$125: D10.C R17.1
N$126: D9.CATHODE R76.2
N$127: TP8.P$1 U24.17
N$129: TP13.P$1 U7.D16
N$130: TP16.P$1 U7.D15
N$131: TP17.P$1 U7.D14
N$133: C18.1 JP104.1 TP14.P$1 TP164.P$1 U4.5 U7.K11 U7.L11
N$134: R29.2 U24.8
N$137: Q3.3 R43.2
N$138: Q3.1 R35.2
N$139: TP56.1 U16.12
N$270: D7.A R61.1
N$271: D8.A R62.1
N$385: TP53.1 U16.11
N$401: TP4.P$1 TP130.P$1 U7.N7 U7.P8 U7.R8 U7.T8
N$404: TP129.P$1 U7.N6
N$405: TP161.P$1 U7.F11 U7.G11
N$407: JP104.2 Q1.C R31.1 U10.3
N$479: Q3.5 R48.2
N$499: TP163.P$1 U7.F10 U7.G10 U7.H10 U7.H11 U7.J10 U7.J11 U7.K10 U7.L10
N$504: TP167.P$1 U7.D4 U7.E4
N$519: TP140.P$1 U7.L4 U7.M4
N$520: TP132.P$1 U7.N4 U7.N5
N$524: TP121.P$1 U7.N10 U7.N11
N$525: TP102.P$1 U7.T11
N$529: TP136.P$1 U7.M13
N$530: J102.6 U7.C2
N$533: J102.4 U7.D1
N$534: J102.2 U7.D2
N$535: JP105.2 U7.G3
N$575: D6.A R49.1
N$578: JP106.2 U7.G2
N$579: Q3.2 R41.2
N$580: R43.1 TP43.1 U13.4
N$582: J3.2 JP107.2 U7.G1
N$583: JP108.2 U7.H3
N$584: JP109.2 U7.H2
N$585: R25.4 U7.H1
N$586: R25.7 U7.J3
N$587: R26.4 U7.J1
N$588: R26.7 U7.K3
N$589: R72.1 U16.13
N$590: Q4.3 Q6.3 R52.1
N$591: R26.3 U7.K2
N$592: R26.8 U7.K1
N$594: R26.2 U7.L3
N$595: R26.9 U7.L2
N$596: R50.1 R51.2 TP57.1 U14.10
N$597: R42.2 R47.1 TP47.1 U14.11
N$599: R47.2 U14.8 U14.12
N$601: R24.4 U7.L1
N$602: R26.1 U7.M3
N$603: C33.1 R33.2 R38.2
N$604: R38.1 U14.5
N$609: R15.2 U7.M16
N$619: R6.2 U2.4 U7.M14
N$620: R7.1 U2.3
N$621: J102.8 U7.C1
N$629: R26.6 U7.J2
N$630: JP109.1 R25.6
N$631: JP107.1 R25.1
N$632: JP108.1 R25.9
N$633: JP106.3 R25.2
N$634: JP105.3 R25.3
N$640: C10.1 C12.1 U3.C2
N$641: R9.6 U3.A3 U7.R3
N$642: R10.1 U3.A4 U7.R2
N$643: R10.9 U3.A5 U7.R1
N$644: R9.7 U3.B2 U7.T3
N$645: R9.4 U3.B3 U7.T2
N$646: R9.3 U3.B4 U7.T1
N$647: R10.8 U3.B5 U7.P4
N$648: R10.2 U3.B6 U7.R4
N$649: R9.2 U3.M5 U7.P1
N$651: R9.8 U3.M6 U7.P2
N$652: R10.3 U3.K5 U7.R13
N$653: R2.1 U7.P13
N$654: R3.1 U7.T14
N$655: R4.1 U7.R14
N$656: R5.1 U7.P14
N$657: R19.2 TP31.P$1 U7.D3
ON/!OFF: C34.1 Q4.1 R46.2 R49.2 TP50.1 U14.1 U16.8
OPD_PWR: J4.15 J4.16 R71.1
OPD_SCL: J4.13 J4.14 R48.1
OPD_SDA: J4.11 J4.12 R41.1
OSC0_GND: C19.1 C22.1 U7.N15
OSC0_IN: C19.2 R13.2 U7.P16 Y1.1
OSC0_OUT: C22.2 R13.1 U7.N16 Y1.3
OSC1_GND1: C29.2 C30.2 U7.B5
OSC1_IN1: C30.1 R27.2 U7.A6 Y2.P$2
OSC1_OUT1: C29.1 R27.1 U7.A5 Y2.P$1
PB6/SCL: TP67.1 U16.4
PB7/SDA: TP68.1 U16.5
PEN-SCL-FILT: Q3.6 R37.2 R65.1 R67.1 R69.1 TP42.1 TP66.1 U16.15
PEN-SDA-FILT: Q3.4 R45.2 R66.2 R68.2 R70.2 TP41.1 TP65.1 U16.16
PMIC_MUX_IN: TP133.P$1 U7.N13
PMIC_PGOOD: TP110.P$1 U4.2 U7.N12 U7.P11
POUT: TP64.1 U14.13
Q0: TP33.1 U7.B1 U23.11
Q1: TP34.1 U7.B2 U23.10
RESET#: JP1.1 TP109.P$1 U4.4 U7.R11
RF-IN [RF]: CM1.RF U5.3
SPARE1: J4.9 J4.10 TP58.P$1
SPARE2: J4.7 J4.8 TP59.P$1
SPARE3: J4.5 J4.6 TP60.P$1
SPARE4: J4.3 J4.4 TP61.P$1
STQ-!RST: C61.2 R21.1 TP28.P$1 U24.1
STQ-EN: R79.2 TP18.P$1 U7.E15 U20.3
STQ-PPS: TP7.P$1 U24.40
STQ-RF [RF]: U19.8 U24.32
STQ-VBAT: C82.2 C85.+ R76.1 U24.18
STQ_UART2_RX: JP2.2 R18.1 TP27.P$1 TP147.P$1 U7.H16
STQ_UART2_TX: JP2.1 R14.1 TP6.P$1 U7.E16
TPS62111-PG: TP48.1 U15.13
TPS62111-SYNC: R34.1 R40.2 TP46.1 U15.5
TPS62111_SW: L1.1 U15.14 U15.15
UART0_RX: J1.12 TP146.P$1 U7.A12
UART0_TX: J1.13 TP142.P$1 U7.B12
USB_CLI_N: J1.5 U1.1 U7.K16
USB_CLI_P: J1.4 U1.3 U7.K15
USB_CLI_VBUS: FB2.1 J1.1 J1.2
USB_HO_N: J1.8 U1.6 U7.L16
USB_HO_PX: J1.7 U1.4 U7.L15
USB_HO_VBUS: FB1.2 J1.17
VBUS: J4.21 J4.22 J4.23 J4.24 J4.25 J4.26 Q6.4 R52.2
VBUSP: C33.2 C37.1 C38.1 Q5.1 Q5.2 Q5.5 Q5.6 R34.2 R61.2 TP55.1 U15.2 U15.3 U15.4 U15.8
VDD: C7.1 C15.1 R7.2 TP3.P$1 U2.5 U7.K6 U7.K7 U7.L6 U7.L7
VIN_USB: C4.1 C13.1 FB2.2 TP2.P$1 U1.5 U7.J16 U7.P9 U7.R9 U7.T9
VOUT_USB: C1.1 FB1.1 TP1.P$1 U2.1 U7.M15
VPD: C39.2 R32.2 R36.2 R44.2 R53.2 R55.2 R57.2 R71.2 R72.2 TP63.1 U12.5 U13.5 U16.14
XTAL: C46.2 TP9.P$1 U23.3

## Tracks (layer width: path | path; a pad name or v marks a point on that pad's centre or on a via)
2.85V-S  (via drill 0.25)
  Top 0.25: R29.1 v71.7,16.8 | R80.1 v78.9,28.6 | R81.1 v73.2,11.8
  Top 0.254: v72.7,15.9 D10.A | 70.71,10.59 70.71,10.54 | 70.8,10.32 70.91,10.32 | v74.2,11.35 D9.ANODE
  Top 0.35: R21.2 v69.1,26.4
  other vias: 71.7,23.9 70.2,23.9 78.8,18.7 77.6,18.7 77.6,19.9 77.5,12.8 69.4,11.3 71,11.3 69.4,14.6 71,14.6 77.5,14.3 77.5,13.5 70.2,11.3
  pour Top: 79,18.5 77.4,18.5 77.4,20.1 79,20.1
  pour Top (no thermals): 68.8,11.8 68.8,10.3 69.56,10.3 69.56,9.9 72.8,9.9 72.8,11.8
  pour Top (isolate 0.254, rank 2, no thermals): 73.6,24.1 69.7,24.1 69.7,22.7 72.5,22.7 72.5,23.9 73.6,23.9
  pour Route15: 68.3,7.9 79.7,7.9 79.7,28.9 68.3,28.9
  pour Top (isolate 0.1, no thermals): 76.2,12.3 77.7,12.3 77.7,14.8 76.2,14.8
2.85VA  (via drill 0.25)
  Top 0.254: C50.1 v71.94,59.67
  Top 0.3: U23.22 76.6,46.2 | U23.27 74.1,45.4 73.6,45.9 | U23.2 v71.8,43.2
  other vias: 69.4,47.5 67.53,58.82 67.4,60.6 67.4,59.84 67.91,57.8 71.7,44.2 71.2,43.2 73.2,46.9 67.9,43.1 72.45,47.4 70.95,47.5 83.2,69 81.1,68.2 77,47.2 77,46.4
  pour Top (isolate 0.254, no thermals): 66.89,57.3 68.92,57.3 68.92,62.76 66.89,62.76
  pour Top (isolate 0.203, rank 2, no thermals): 72.2,43.4 66.62,43.4 66.62,42.11 68.78,42.11 69.3,42.1 69.3,42.99 72.2,42.99
  pour Top (isolate 0.2, no thermals): 69.7,44 69.7,45.4 72.5,45.4 72.92,44.98 73.7,44.98 73.7,44
  pour Top (isolate 0.2, no thermals): 69.2,48.2 69.2,47.2 72,47.2 73.9,45.3 74.1,45.3 74.1,48.2
  pour Top (isolate 0.2, no thermals): 80.3,67.9 80.9,67.9 81.3,67.5 82.9,67.5 83.5,67.5 83.5,69.3 82.3,69.3 82.3,68.6 80.3,68.6
  pour Route15: 66,40.7 77.5,40.7 77.5,64.9 84.7,64.9 84.7,69.3 73.6,69.3 73.6,63 66.8,63 66.8,57.3 72.3,57.3 72.3,50.7 68.8,50.7 68.8,46.5 66,46.5
  pour Top (isolate 0.2, no thermals): 76.5,46 77.5,46 77.5,50.1 76.5,50.1
2.85VD  (via drill 0.25)
  Top 0.2: U23.6 72.17,41.2 72.03,41.06 72.03,39.43 71.9,39.3 v71.7,39.3
  Top 0.254: v68.1,33.2 C60.1
  Top 0.3: R12.2 70.3,32.5 v70.1,32.3
  other vias: 77.2,39.3 78.3,39.3 71,39.3 72.45,39.3 67,40 67.6,40 67.6,39.3 67,39.3 66.6,35.4 67.8,37.2 69.3,37.2 67.1,35.7 71.4,35.4